# EAGLE board RP2040_MikroBUS-Panel (EAGLE 9.6.2), part 1 of 3
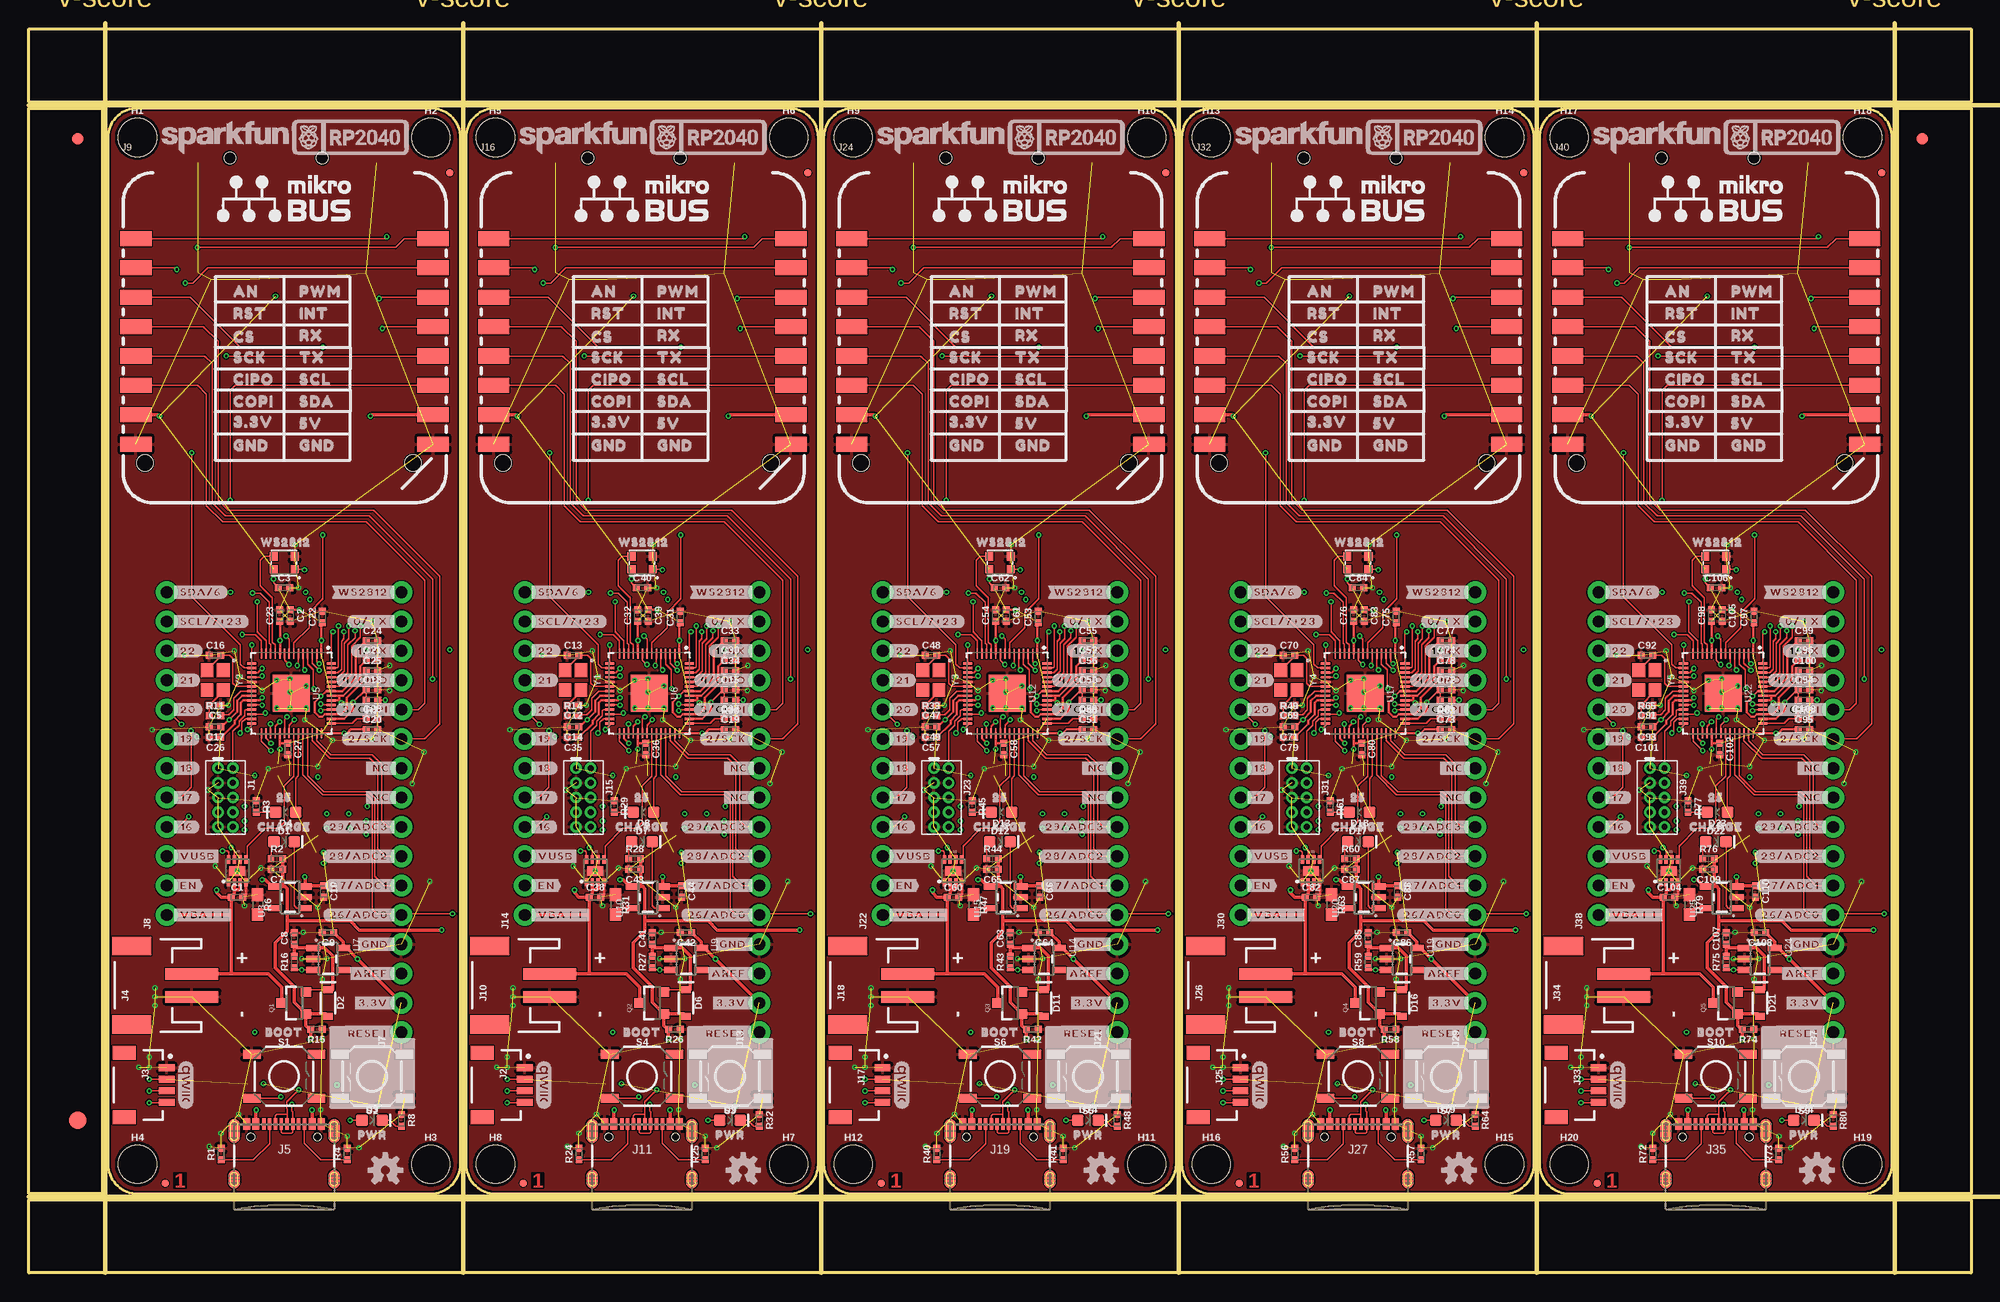
[diagram p0: board, top side]
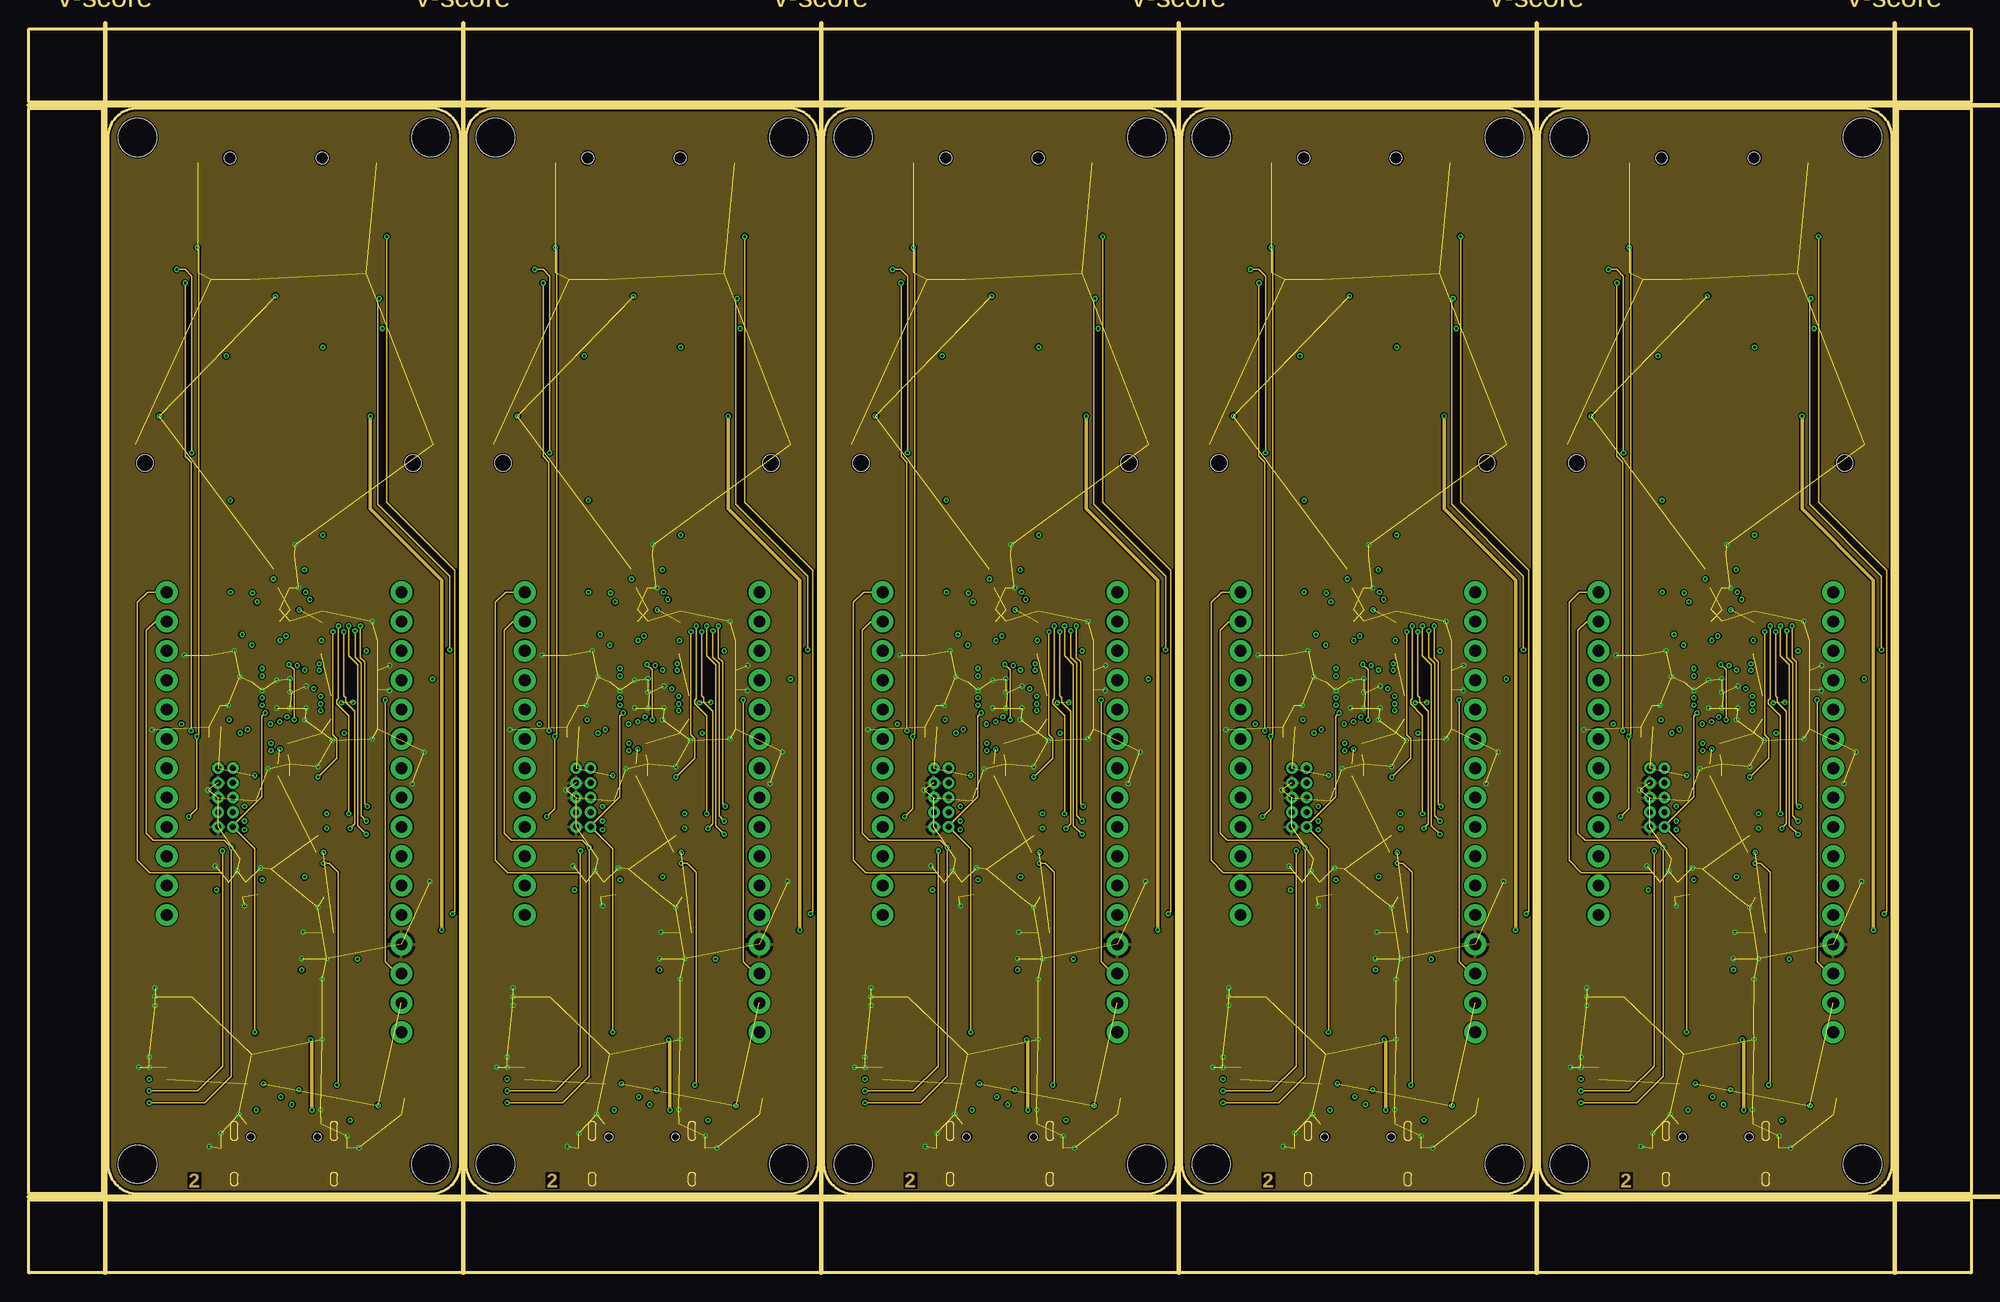
[diagram p1: board, inner layer Route2]
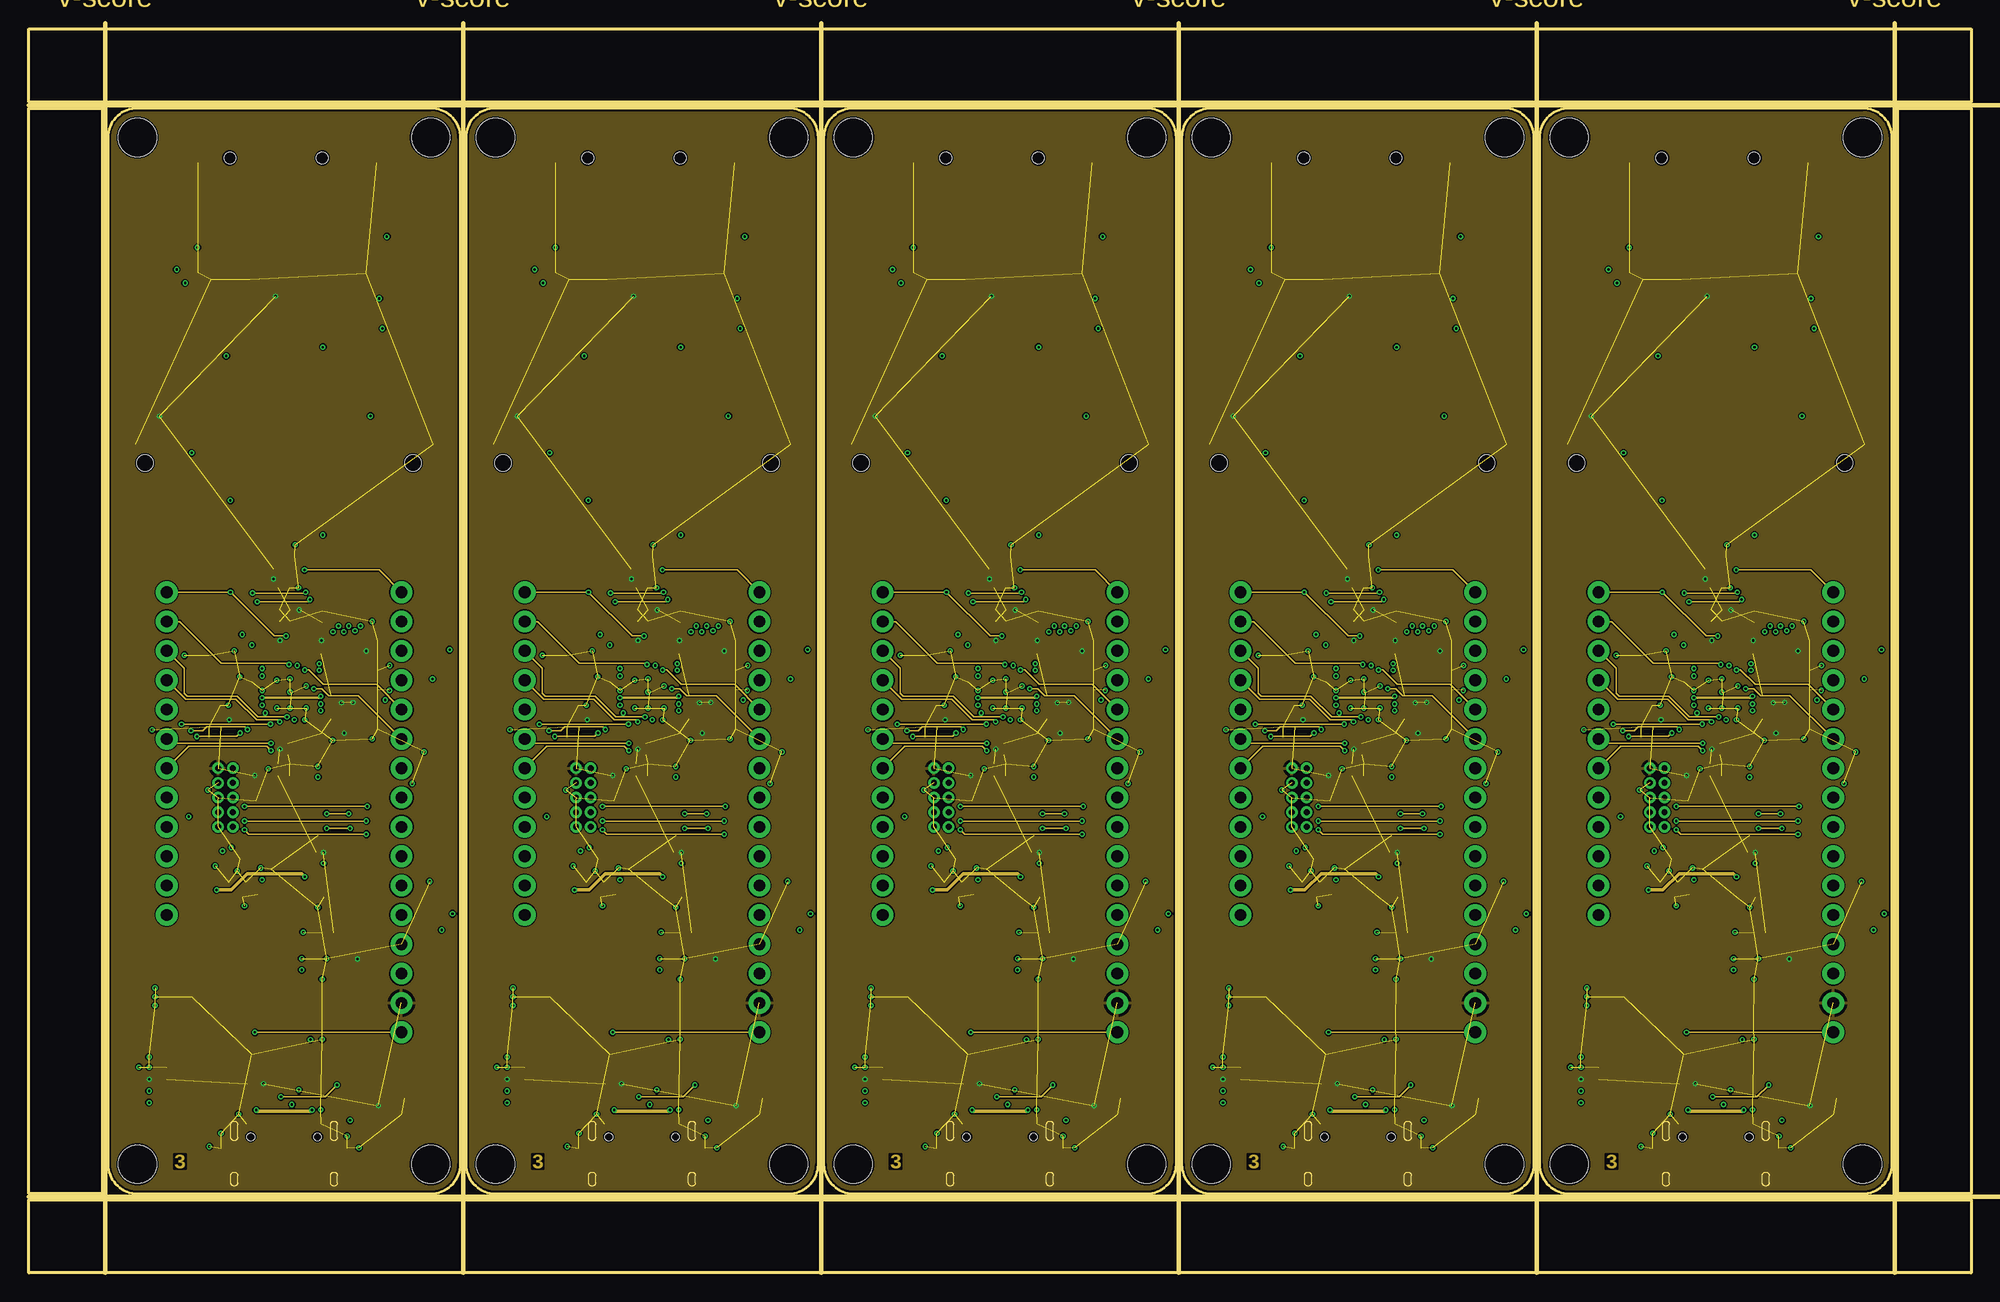
[diagram p2: board, inner layer Route15]
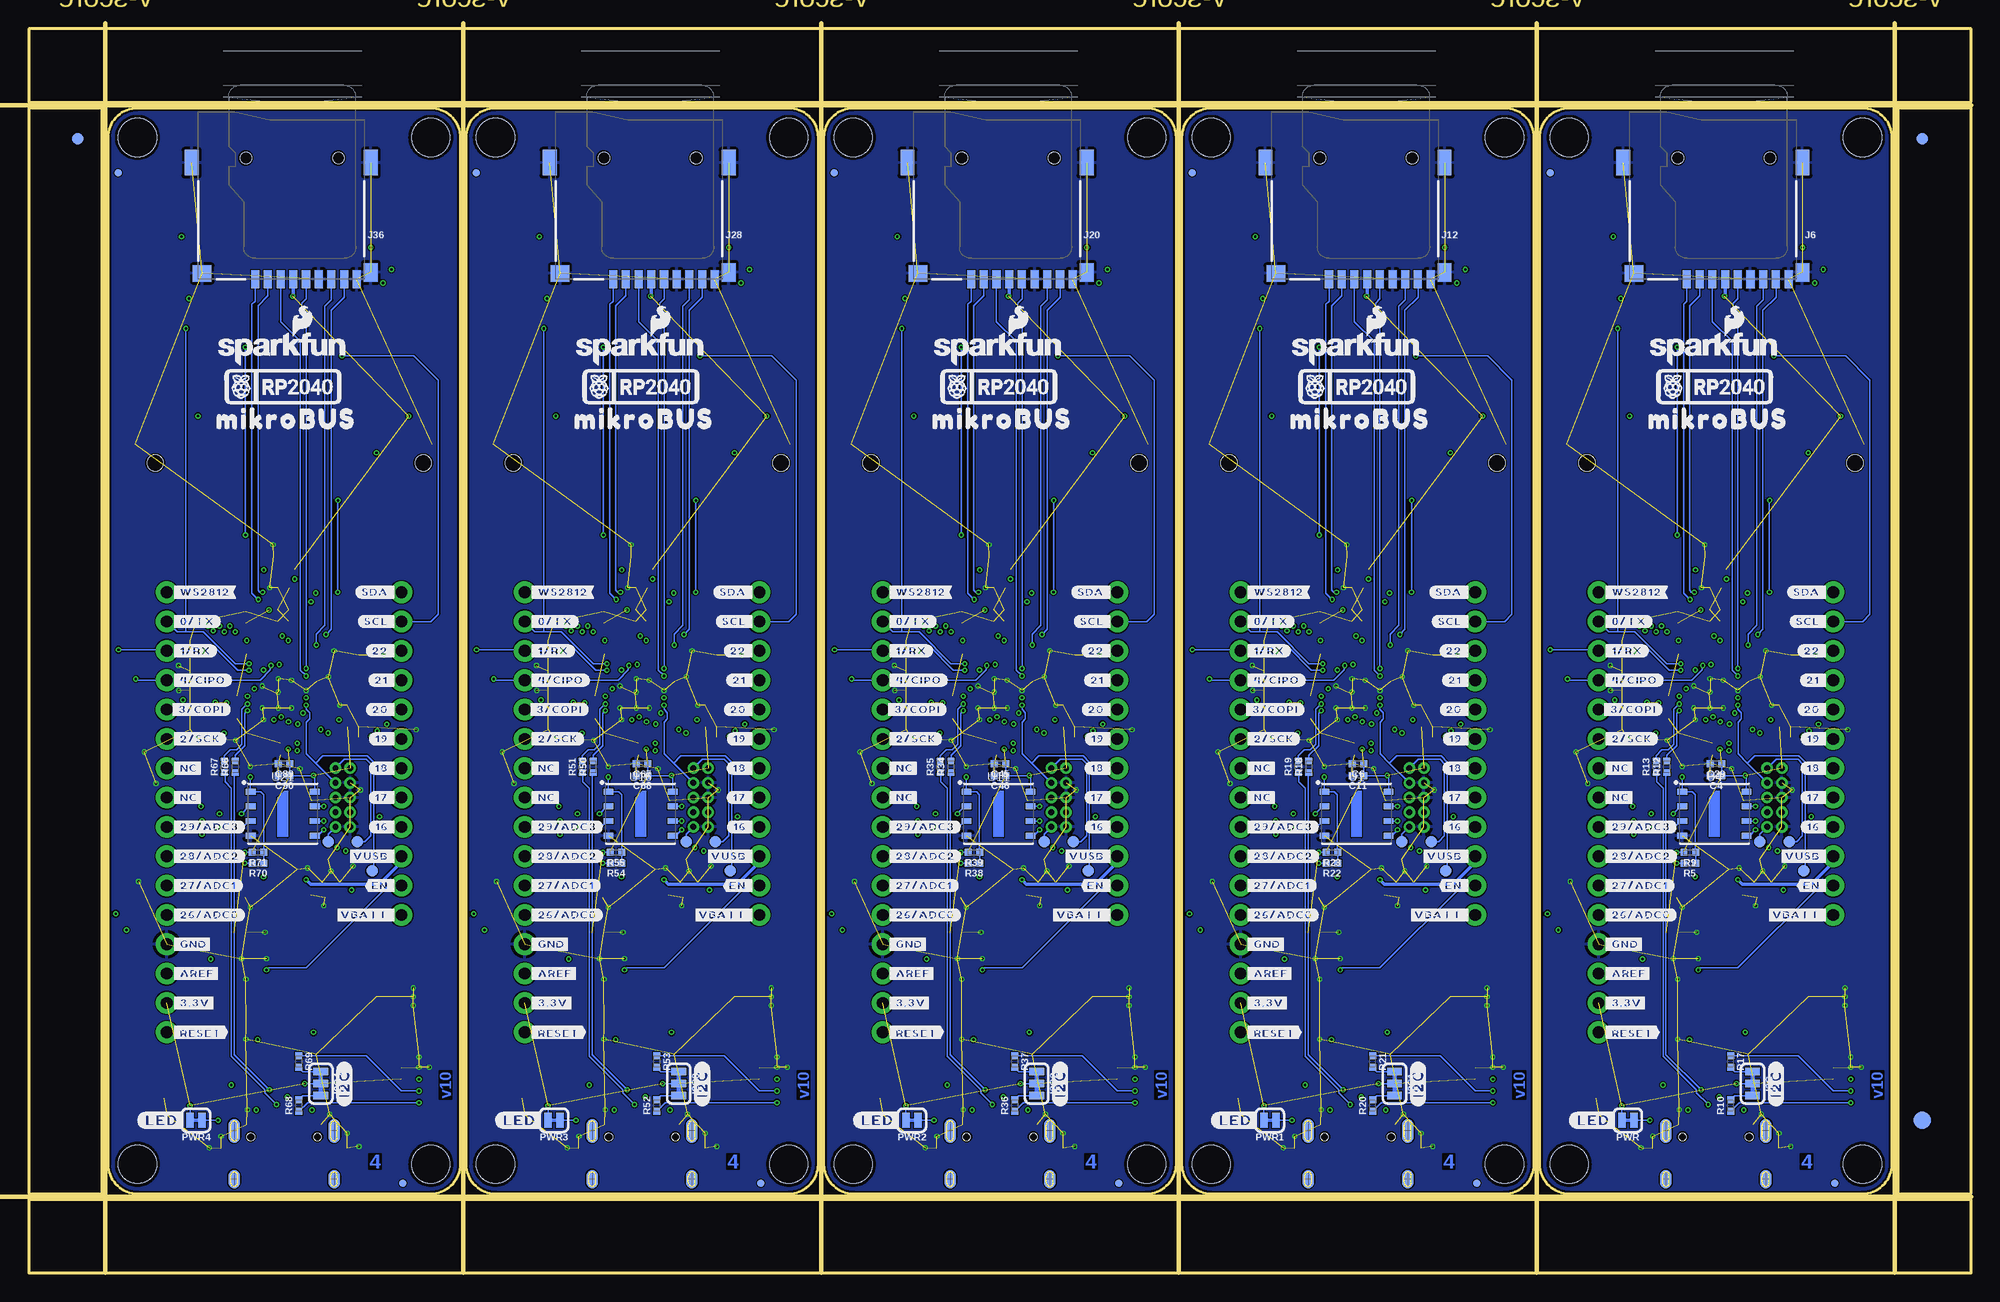
[diagram p3: board, bottom side, seen from below]

Size 168.15 x 107.7 mm. Coordinates in mm from the lower left corner, seen from the top.
Outline: 9.4,100.84 34.8,100.84 arc-90 37.34,98.3 37.34,9.4 arc-90 34.8,6.86 9.4,6.86 arc-90 6.86,9.4 6.86,98.3 arc-90 9.4,100.84
Outline: 40.39,100.84 65.79,100.84 arc-90 68.33,98.3 68.33,9.4 arc-90 65.79,6.86 40.39,6.86 arc-90 37.85,9.4 37.85,98.3 arc-90 40.39,100.84
Outline: 71.37,100.84 96.77,100.84 arc-90 99.31,98.3 99.31,9.4 arc-90 96.77,6.86 71.37,6.86 arc-90 68.83,9.4 68.83,98.3 arc-90 71.37,100.84
Outline: 102.36,100.84 127.76,100.84 arc-90 130.3,98.3 130.3,9.4 arc-90 127.76,6.86 102.36,6.86 arc-90 99.82,9.4 99.82,98.3 arc-90 102.36,100.84
Outline: 133.35,100.84 158.75,100.84 arc-90 161.29,98.3 161.29,9.4 arc-90 158.75,6.86 133.35,6.86 arc-90 130.81,9.4 130.81,98.3 arc-90 133.35,100.84
Outline: 0,6.35 168.15,6.35 168.15,0 0,0 0,6.35
Outline: 161.8,100.84 168.15,100.84 168.15,6.86 161.8,6.86 161.8,100.84
Outline: 0,107.7 168.15,107.7 168.15,101.35 0,101.35 0,107.7
Outline: 0,100.84 6.35,100.84 6.35,6.86 0,6.86 0,100.84
Copper layers (1+2*15+16): Top 0.035mm / dielectric 1.5mm / Route2 0.035mm / dielectric 0.15mm / Route15 0.035mm / dielectric 0.2mm / Bottom 0.035mm
Design rules "RP2040_MikroBUS": minimum track width 4mil, minimum drill 0.2mm, track to track 4mil, track to pad 4mil, pad to pad 4mil, via to via 4mil, smd to smd 4mil, copper to edge 6mil, drill to drill 6mil, minimum pad ring 3mil, minimum via ring 3mil, stop-mask expansion 2.5mil, vias tented up to drill 25mil, thermal gap 10mil
Net classes: 0 default: width 0 mm, drill 0 mm; 2 Clock: width 0.089 mm, clearance 0.178 mm
Milling: 8 lines

## Footprints (pad centres in the part's own frame; a part is rotated, then mirrored left to right if it is on the bottom)
0402-TIGHT = smd 0.6 x 0.6: 1 -0.5,0; 2 0.5,0
LED-0603 = smd 1 x 1: A -0.877,0; C 0.877,0
SOD-323 = smd 0.63 x 0.83: A 1.15,0; C -1.15,0
WS2812-2020 = smd 0.7 x 0.7: DI -0.915,0.55; DO 0.915,-0.55; GND 0.915,0.55; VCC -0.915,-0.55
FIDUCIAL-1X2 = smd 1 x 1: 1 0,0
FIDUCIAL-1.5X3 = smd 1.5 x 1.5: 1 0,0
FIDUCIAL-MICRO = smd 0.635 x 0.635: 1 0,0
STAND-OFF = hole 3.302: 0,0
SMT-JUMPER_3_2-NC_TRACE_SILK = smd 0.66 x 1.27: 1 -1.041,0; 2 0,0; 3 1.041,0
2X5-PTH-1.27MM = drill 0.508 pad 1: 1 -2.54,-0.635; 2 -2.54,0.635; 3 -1.27,-0.635; 4 -1.27,0.635; 5 0,-0.635; 6 0,0.635; 7 1.27,-0.635; 8 1.27,0.635; 9 2.54,-0.635; 10 2.54,0.635
JST04_1MM_RA = smd 0.6 x 1.35: 1 -1.5,0; 2 -0.5,0; 3 0.5,0; 4 1.5,0 | smd 1.2 x 2: NC1 2.8,-3.675; NC2 -2.8,-3.675
JST-2-SMD = smd 1 x 4.6: 1 -1,-3.7; 2 1,-3.7 | smd 1.6 x 3.4: NC1 -3.4,1.5; NC2 3.4,1.5
USB-C-16P-4LAYER-ISOLATED = smd 0.3 x 1: A5 -1.25,-0.34; A6 -0.25,-0.34; A7 0.25,-0.34; A8 1.25,-0.34; B5 1.75,-0.34; B6 0.75,-0.34; B7 -0.75,-0.34; B8 -1.75,-0.34 | smd 0.6 x 1: GND -3.225,-0.34; GND2 3.225,-0.34; VBUS1 -2.45,-0.34; VBUS2 2.45,-0.34 | smd 1 x 2.1: SHLD1 -4.32,-0.915; SHLD2 4.32,-0.915 | smd 1 x 2.1 bottom: SHLD3 -4.32,-0.915; SHLD4 4.32,-0.915 | smd 1 x 1.6: SHLD5 -4.32,-5.095; SHLD8 4.32,-5.095 | smd 1 x 1.6 bottom: SHLD6 -4.32,-5.095; SHLD7 4.32,-5.095 | hole 0.65: -2.89,-1.445; 2.89,-1.445
MICROSD-EXTERNALPIN = smd 0.7 x 1.6: 1 2.25,10.5; 2 1.15,10.5; 3 0.05,10.5; 4 -1.05,10.5; 5 -2.15,10.5; 6 -3.25,10.5; 7 -4.35,10.5; 8 -5.45,10.5; 9 -6.55,10.5 | smd 1.2 x 1.6: 10 -7.75,9.9 | smd 1.2 x 2.2: 11 -7.75,0.4; 12 7.75,0.4 | smd 1.6 x 1.4: 13 6.85,10 | hole 1: 3.05,0; -4.95,0
1X16_NO_SILK = drill 1.016 pad 1.88: 1 0,0; 2 2.54,0; 3 5.08,0; 4 7.62,0; 5 10.16,0; 6 12.7,0; 7 15.24,0; 8 17.78,0; 9 20.32,0; 10 22.86,0; 11 25.4,0; 12 27.94,0; 13 30.48,0; 14 33.02,0; 15 35.56,0; 16 38.1,0
1X12_NO_SILK = drill 1.016 pad 1.88: 1 0,0; 2 2.54,0; 3 5.08,0; 4 7.62,0; 5 10.16,0; 6 12.7,0; 7 15.24,0; 8 17.78,0; 9 20.32,0; 10 22.86,0; 11 25.4,0; 12 27.94,0
MIKROBUS_SMD_BLACK = smd 2.7 x 1.3: 1 -12.7,8.89; 2 -12.7,6.35; 3 -12.7,3.81; 4 -12.7,1.27; 5 -12.7,-1.27; 6 -12.7,-3.81; 7 -12.7,-6.35; 8 -12.7,-8.89; 9 13.02,-8.89; 10 13.02,-6.35; 11 13.02,-3.81; 12 13.02,-1.27; 13 13.02,1.27; 14 13.02,3.81; 15 13.02,6.35; 16 13.02,8.89 | hole 1.4: -11.914,-10.541; 11.286,-10.541
SMT-JUMPER_2_NC_TRACE_SILK = smd 0.66 x 1.27: 1 -0.521,0; 2 0.521,0
SOT23-3 = smd 0.8 x 0.9: 1 -0.95,-1; 2 0.95,-1; 3 0,1.1
0603 = smd 1.1 x 1: 1 -0.85,0; 2 0.85,0
TACTILE_SWITCH_SMD_5.2MM = smd 1.524 x 0.762: 1 -2.794,1.905; 2 2.794,1.905; 3 -2.794,-1.905; 4 2.794,-1.905
PAD.03X.04 = smd 1.016 x 1.016: 1 0,0
WSON-8-6X5-SKINNY_CENTERPAD = smd 0.85 x 0.5: 1 -2.775,1.905; 2 -2.775,0.635; 3 -2.775,-0.635; 4 -2.775,-1.905; 5 2.775,-1.905; 6 2.775,-0.635; 7 2.775,0.635; 8 2.775,1.905
DFN-8 = smd 0.3 x 0.7: 1 -0.75,-0.99; 2 -0.25,-0.99; 3 0.25,-0.99; 4 0.75,-0.99; 5 0.75,0.99; 6 0.25,0.99; 7 -0.25,0.99; 8 -0.75,0.99 | smd 1.38 x 0.8: 9 0,0
SOT23-5 = smd 0.55 x 1.2: 1 -0.95,-1.3; 2 0,-1.3; 3 0.95,-1.3; 4 0.95,1.3; 5 -0.95,1.3
QFN-56 = smd 0.875 x 0.2: 1 -3.437,2.6; 2 -3.437,2.2; 3 -3.437,1.8; 4 -3.437,1.4; 5 -3.437,1; 6 -3.437,0.6; 7 -3.437,0.2; 8 -3.437,-0.2; 9 -3.437,-0.6; 10 -3.437,-1; 11 -3.437,-1.4; 12 -3.437,-1.8; 13 -3.437,-2.2; 14 -3.437,-2.6; 29 3.437,-2.6; 30 3.437,-2.2; 31 3.437,-1.8; 32 3.437,-1.4; 33 3.437,-1; 34 3.437,-0.6; 35 3.437,-0.2; 36 3.437,0.2; 37 3.437,0.6; 38 3.437,1; 39 3.437,1.4; 40 3.437,1.8; 41 3.437,2.2; 42 3.437,2.6 | smd 0.2 x 0.875: 15 -2.6,-3.437; 16 -2.2,-3.437; 17 -1.8,-3.437; 18 -1.4,-3.437; 19 -1,-3.437; 20 -0.6,-3.437; 21 -0.2,-3.437; 22 0.2,-3.437; 23 0.6,-3.437; 24 1,-3.437; 25 1.4,-3.437; 26 1.8,-3.437; 27 2.2,-3.437; 28 2.6,-3.437; 43 2.6,3.437; 44 2.2,3.437; 45 1.8,3.437; 46 1.4,3.437; 47 1,3.437; 48 0.6,3.437; 49 0.2,3.437; 50 -0.2,3.437; 51 -0.6,3.437; 52 -1,3.437; 53 -1.4,3.437; 54 -1.8,3.437; 55 -2.2,3.437; 56 -2.6,3.437 | smd 3.2 x 3.2: EPAD 0,0
CRYSTAL-SMD-2X2.5MM = smd 1.2 x 1.1: P1 0.846,0.69; P2 -0.854,0.69; P3 -0.854,-0.71; P4 0.846,-0.71

## Placement (x,y rotation side)
C1  0.1uF  [0402-TIGHT]  18.03,32.51 0 top
C2  0.1uF  [0402-TIGHT]  22.64,56.9 270 top
C3  0.1uF  [0402-TIGHT]  22.1,59.31 0 top
C4  2.2uF  [0402-TIGHT]  22.1,43.05 180 bottom
C5  15pF  [0402-TIGHT]  16.13,49.15 180 top
C6  0.1uF  [0402-TIGHT]  53.09,44.07 180 bottom
C7  4.7uF  [0402-TIGHT]  21.46,34.92 180 top
C8  1.0uF  [0402-TIGHT]  22.99,28.96 90 top
C9  2.2uF  [0402-TIGHT]  25.91,29.46 180 top
C10  4.7uF  [0402-TIGHT]  25.53,33.02 270 top
C11  2.2uF  [0402-TIGHT]  53.09,43.05 180 bottom
C12  15pF  [0402-TIGHT]  47.12,49.15 180 top
C13  15pF  [0402-TIGHT]  47.12,53.47 0 top
C14  0.1uF  [0402-TIGHT]  47.12,47.28 180 top
C15  0.1uF  [0402-TIGHT]  60.71,50.48 0 top
C16  15pF  [0402-TIGHT]  16.13,53.47 0 top
C17  0.1uF  [0402-TIGHT]  16.13,47.28 180 top
C18  0.1uF  [0402-TIGHT]  29.72,50.48 0 top
C19  0.1uF  [0402-TIGHT]  60.71,47.04 0 top
C20  0.1uF  [0402-TIGHT]  29.72,47.04 0 top
C21  0.1uF  [0402-TIGHT]  29.72,53.05 0 top
C22  0.1uF  [0402-TIGHT]  25.4,56.77 90 top
C23  0.1uF  [0402-TIGHT]  21.72,56.9 90 top
C24  0.1uF  [0402-TIGHT]  29.72,54.74 0 top
C25  0.1uF  [0402-TIGHT]  29.72,52.13 0 top
C26  2.2uF  [0402-TIGHT]  16.13,46.35 180 top
C27  2.2uF  [0402-TIGHT]  22.43,45.34 270 top
C28  2.2uF  [0402-TIGHT]  29.72,47.96 0 top
C29  0.1uF  [0402-TIGHT]  22.1,44.07 180 bottom
C30  0.1uF  [0402-TIGHT]  60.71,53.05 0 top
C31  0.1uF  [0402-TIGHT]  56.39,56.77 90 top
C32  0.1uF  [0402-TIGHT]  52.7,56.9 90 top
C33  0.1uF  [0402-TIGHT]  60.71,54.74 0 top
C34  0.1uF  [0402-TIGHT]  60.71,52.13 0 top
C35  2.2uF  [0402-TIGHT]  47.12,46.35 180 top
C36  2.2uF  [0402-TIGHT]  53.42,45.34 270 top
C37  2.2uF  [0402-TIGHT]  60.71,47.96 0 top
C38  0.1uF  [0402-TIGHT]  49.02,32.51 0 top
C39  0.1uF  [0402-TIGHT]  53.63,56.9 270 top
C40  0.1uF  [0402-TIGHT]  53.09,59.31 0 top
C41  1.0uF  [0402-TIGHT]  53.97,28.96 90 top
C42  2.2uF  [0402-TIGHT]  56.9,29.46 180 top
C43  4.7uF  [0402-TIGHT]  52.45,34.92 180 top
C44  4.7uF  [0402-TIGHT]  56.51,33.02 270 top
C45  0.1uF  [0402-TIGHT]  84.07,44.07 180 bottom
C46  2.2uF  [0402-TIGHT]  84.07,43.05 180 bottom
C47  15pF  [0402-TIGHT]  78.11,49.15 180 top
C48  15pF  [0402-TIGHT]  78.11,53.47 0 top
C49  0.1uF  [0402-TIGHT]  78.11,47.28 180 top
C50  0.1uF  [0402-TIGHT]  91.69,50.48 0 top
C51  0.1uF  [0402-TIGHT]  91.69,47.04 0 top
C52  0.1uF  [0402-TIGHT]  91.69,53.05 0 top
C53  0.1uF  [0402-TIGHT]  87.38,56.77 90 top
C54  0.1uF  [0402-TIGHT]  83.69,56.9 90 top
C55  0.1uF  [0402-TIGHT]  91.69,54.74 0 top
C56  0.1uF  [0402-TIGHT]  91.69,52.13 0 top
C57  2.2uF  [0402-TIGHT]  78.11,46.35 180 top
C58  2.2uF  [0402-TIGHT]  84.4,45.34 270 top
C59  2.2uF  [0402-TIGHT]  91.69,47.96 0 top
C60  0.1uF  [0402-TIGHT]  80.01,32.51 0 top
C61  0.1uF  [0402-TIGHT]  84.62,56.9 270 top
C62  0.1uF  [0402-TIGHT]  84.07,59.31 0 top
C63  1.0uF  [0402-TIGHT]  84.96,28.96 90 top
C64  2.2uF  [0402-TIGHT]  87.88,29.46 180 top
C65  4.7uF  [0402-TIGHT]  83.44,34.92 180 top
C66  4.7uF  [0402-TIGHT]  87.5,33.02 270 top
C67  0.1uF  [0402-TIGHT]  115.06,44.07 180 bottom
C68  2.2uF  [0402-TIGHT]  115.06,43.05 180 bottom
C69  15pF  [0402-TIGHT]  109.09,49.15 180 top
C70  15pF  [0402-TIGHT]  109.09,53.47 0 top
C71  0.1uF  [0402-TIGHT]  109.09,47.28 180 top
C72  0.1uF  [0402-TIGHT]  122.68,50.48 0 top
C73  0.1uF  [0402-TIGHT]  122.68,47.04 0 top
C74  0.1uF  [0402-TIGHT]  122.68,53.05 0 top
C75  0.1uF  [0402-TIGHT]  118.36,56.77 90 top
C76  0.1uF  [0402-TIGHT]  114.68,56.9 90 top
C77  0.1uF  [0402-TIGHT]  122.68,54.74 0 top
C78  0.1uF  [0402-TIGHT]  122.68,52.13 0 top
C79  2.2uF  [0402-TIGHT]  109.09,46.35 180 top
C80  2.2uF  [0402-TIGHT]  115.39,45.34 270 top
C81  2.2uF  [0402-TIGHT]  122.68,47.96 0 top
C82  0.1uF  [0402-TIGHT]  111,32.51 0 top
C83  0.1uF  [0402-TIGHT]  115.61,56.9 270 top
C84  0.1uF  [0402-TIGHT]  115.06,59.31 0 top
C85  1.0uF  [0402-TIGHT]  115.95,28.96 90 top
C86  2.2uF  [0402-TIGHT]  118.87,29.46 180 top
C87  4.7uF  [0402-TIGHT]  114.43,34.92 180 top
C88  4.7uF  [0402-TIGHT]  118.49,33.02 270 top
C89  0.1uF  [0402-TIGHT]  146.05,44.07 180 bottom
C90  2.2uF  [0402-TIGHT]  146.05,43.05 180 bottom
C91  15pF  [0402-TIGHT]  140.08,49.15 180 top
C92  15pF  [0402-TIGHT]  140.08,53.47 0 top
C93  0.1uF  [0402-TIGHT]  140.08,47.28 180 top
C94  0.1uF  [0402-TIGHT]  153.67,50.48 0 top
C95  0.1uF  [0402-TIGHT]  153.67,47.04 0 top
C96  0.1uF  [0402-TIGHT]  153.67,53.05 0 top
C97  0.1uF  [0402-TIGHT]  149.35,56.77 90 top
C98  0.1uF  [0402-TIGHT]  145.67,56.9 90 top
C99  0.1uF  [0402-TIGHT]  153.67,54.74 0 top
C100  0.1uF  [0402-TIGHT]  153.67,52.13 0 top
C101  2.2uF  [0402-TIGHT]  140.08,46.35 180 top
C102  2.2uF  [0402-TIGHT]  146.38,45.34 270 top
C103  2.2uF  [0402-TIGHT]  153.67,47.96 0 top
C104  0.1uF  [0402-TIGHT]  141.99,32.51 0 top
C105  0.1uF  [0402-TIGHT]  146.6,56.9 270 top
C106  0.1uF  [0402-TIGHT]  146.05,59.31 0 top
C107  1.0uF  [0402-TIGHT]  146.94,28.96 90 top
C108  2.2uF  [0402-TIGHT]  149.86,29.46 180 top
C109  4.7uF  [0402-TIGHT]  145.41,34.92 180 top
C110  4.7uF  [0402-TIGHT]  149.48,33.02 270 top
D1  Yellow  [LED-0603]  22.1,37.34 0 top
D2  1A/23V/620mV  [SOD-323]  25.91,23.37 270 top
D3  RED  [LED-0603]  29.72,13.21 0 top
D4  BLUE  [LED-0603]  22.23,39.88 180 top
D5  WS2812_2020  [WS2812-2020]  22.1,61.47 0 top
D6  1A/23V/620mV  [SOD-323]  56.9,23.37 270 top
D7  Yellow  [LED-0603]  53.09,37.34 0 top
D8  BLUE  [LED-0603]  53.21,39.88 180 top
D9  RED  [LED-0603]  60.71,13.21 0 top
D10  WS2812_2020  [WS2812-2020]  53.09,61.47 0 top
D11  1A/23V/620mV  [SOD-323]  87.88,23.37 270 top
D12  Yellow  [LED-0603]  84.07,37.34 0 top
D13  BLUE  [LED-0603]  84.2,39.88 180 top
D14  RED  [LED-0603]  91.69,13.21 0 top
D15  WS2812_2020  [WS2812-2020]  84.07,61.47 0 top
D16  1A/23V/620mV  [SOD-323]  118.87,23.37 270 top
D17  Yellow  [LED-0603]  115.06,37.34 0 top
D18  BLUE  [LED-0603]  115.19,39.88 180 top
D19  RED  [LED-0603]  122.68,13.21 0 top
D20  WS2812_2020  [WS2812-2020]  115.06,61.47 0 top
D21  1A/23V/620mV  [SOD-323]  149.86,23.37 270 top
D22  Yellow  [LED-0603]  146.05,37.34 0 top
D23  BLUE  [LED-0603]  146.18,39.88 180 top
D24  RED  [LED-0603]  153.67,13.21 0 top
D25  WS2812_2020  [WS2812-2020]  146.05,61.47 0 top
E$1  [FIDUCIAL-1X2]  4.23,98.17 0 top
E$2  [FIDUCIAL-1X2]  4.23,98.17 0 bottom
E$3  [FIDUCIAL-1X2]  163.91,98.17 0 top
E$4  [FIDUCIAL-1X2]  163.91,98.17 0 bottom
E$5  [FIDUCIAL-1.5X3]  4.23,13.21 0 top
E$6  [FIDUCIAL-1.5X3]  4.23,13.21 0 bottom
FD1  FIDUCIALUFIDUCIAL  [FIDUCIAL-MICRO]  11.81,7.75 0 top
FD2  FIDUCIALUFIDUCIAL  [FIDUCIAL-MICRO]  36.45,95.25 0 top
FD3  FIDUCIALUFIDUCIAL  [FIDUCIAL-MICRO]  11.81,7.75 0 bottom
FD4  FIDUCIALUFIDUCIAL  [FIDUCIAL-MICRO]  36.45,95.25 0 bottom
FD5  FIDUCIALUFIDUCIAL  [FIDUCIAL-MICRO]  42.8,7.75 0 top
FD6  FIDUCIALUFIDUCIAL  [FIDUCIAL-MICRO]  67.44,95.25 0 top
FD7  FIDUCIALUFIDUCIAL  [FIDUCIAL-MICRO]  42.8,7.75 0 bottom
FD8  FIDUCIALUFIDUCIAL  [FIDUCIAL-MICRO]  67.44,95.25 0 bottom
FD9  FIDUCIALUFIDUCIAL  [FIDUCIAL-MICRO]  73.79,7.75 0 top
FD10  FIDUCIALUFIDUCIAL  [FIDUCIAL-MICRO]  98.42,95.25 0 top
FD11  FIDUCIALUFIDUCIAL  [FIDUCIAL-MICRO]  73.79,7.75 0 bottom
FD12  FIDUCIALUFIDUCIAL  [FIDUCIAL-MICRO]  98.42,95.25 0 bottom
FD13  FIDUCIALUFIDUCIAL  [FIDUCIAL-MICRO]  104.78,7.75 0 top
FD14  FIDUCIALUFIDUCIAL  [FIDUCIAL-MICRO]  129.41,95.25 0 top
FD15  FIDUCIALUFIDUCIAL  [FIDUCIAL-MICRO]  104.78,7.75 0 bottom
FD16  FIDUCIALUFIDUCIAL  [FIDUCIAL-MICRO]  129.41,95.25 0 bottom
FD17  FIDUCIALUFIDUCIAL  [FIDUCIAL-MICRO]  135.76,7.75 0 top
FD18  FIDUCIALUFIDUCIAL  [FIDUCIAL-MICRO]  160.4,95.25 0 top
FD19  FIDUCIALUFIDUCIAL  [FIDUCIAL-MICRO]  135.76,7.75 0 bottom
FD20  FIDUCIALUFIDUCIAL  [FIDUCIAL-MICRO]  160.4,95.25 0 bottom
H1  STAND-OFF  [STAND-OFF]  9.4,98.3 0 top
H2  STAND-OFF  [STAND-OFF]  34.8,98.3 0 top
H3  STAND-OFF  [STAND-OFF]  34.8,9.4 0 top
H4  STAND-OFF  [STAND-OFF]  9.4,9.4 0 top
H5  STAND-OFF  [STAND-OFF]  40.39,98.3 0 top
H6  STAND-OFF  [STAND-OFF]  65.79,98.3 0 top
H7  STAND-OFF  [STAND-OFF]  65.79,9.4 0 top
H8  STAND-OFF  [STAND-OFF]  40.39,9.4 0 top
H9  STAND-OFF  [STAND-OFF]  71.37,98.3 0 top
H10  STAND-OFF  [STAND-OFF]  96.77,98.3 0 top
H11  STAND-OFF  [STAND-OFF]  96.77,9.4 0 top
H12  STAND-OFF  [STAND-OFF]  71.37,9.4 0 top
H13  STAND-OFF  [STAND-OFF]  102.36,98.3 0 top
H14  STAND-OFF  [STAND-OFF]  127.76,98.3 0 top
H15  STAND-OFF  [STAND-OFF]  127.76,9.4 0 top
H16  STAND-OFF  [STAND-OFF]  102.36,9.4 0 top
H17  STAND-OFF  [STAND-OFF]  133.35,98.3 0 top
H18  STAND-OFF  [STAND-OFF]  158.75,98.3 0 top
H19  STAND-OFF  [STAND-OFF]  158.75,9.4 0 top
H20  STAND-OFF  [STAND-OFF]  133.35,9.4 0 top
I2C  JUMPER-SMT_3_2-NC_TRACE_SILK  [SMT-JUMPER_3_2-NC_TRACE_SILK]  18.92,16.38 270 bottom
I2C1  JUMPER-SMT_3_2-NC_TRACE_SILK  [SMT-JUMPER_3_2-NC_TRACE_SILK]  49.91,16.38 270 bottom
I2C2  JUMPER-SMT_3_2-NC_TRACE_SILK  [SMT-JUMPER_3_2-NC_TRACE_SILK]  80.9,16.38 270 bottom
I2C3  JUMPER-SMT_3_2-NC_TRACE_SILK  [SMT-JUMPER_3_2-NC_TRACE_SILK]  111.89,16.38 270 bottom
I2C4  JUMPER-SMT_3_2-NC_TRACE_SILK  [SMT-JUMPER_3_2-NC_TRACE_SILK]  142.88,16.38 270 bottom
J1  SWD  [2X5-PTH-1.27MM]  17.02,41.15 270 top
J2  Qwiic  [JST04_1MM_RA]  42.93,16.26 270 top
J3  Qwiic  [JST04_1MM_RA]  11.94,16.26 270 top
J4  [JST-2-SMD]  10.41,24.89 90 top
J5  USB C  [USB-C-16P-4LAYER-ISOLATED]  22.1,13.21 0 top
J6  microSD  [MICROSD-EXTERNALPIN]  22.35,96.52 180 bottom
J7  [1X16_NO_SILK]  32.26,20.83 90 top
J8  [1X12_NO_SILK]  11.94,30.99 90 top
J9  MIKROBUS_SMD_BLACK1  [MIKROBUS_SMD_BLACK]  21.97,80.65 0 top
J10  [JST-2-SMD]  41.4,24.89 90 top
J11  USB C  [USB-C-16P-4LAYER-ISOLATED]  53.09,13.21 0 top
J12  microSD  [MICROSD-EXTERNALPIN]  53.34,96.52 180 bottom
J13  [1X16_NO_SILK]  63.25,20.83 90 top
J14  [1X12_NO_SILK]  42.93,30.99 90 top
J15  SWD  [2X5-PTH-1.27MM]  48.01,41.15 270 top
J16  MIKROBUS_SMD_BLACK1  [MIKROBUS_SMD_BLACK]  52.96,80.65 0 top
J17  Qwiic  [JST04_1MM_RA]  73.91,16.26 270 top
J18  [JST-2-SMD]  72.39,24.89 90 top
J19  USB C  [USB-C-16P-4LAYER-ISOLATED]  84.07,13.21 0 top
J20  microSD  [MICROSD-EXTERNALPIN]  84.33,96.52 180 bottom
J21  [1X16_NO_SILK]  94.23,20.83 90 top
J22  [1X12_NO_SILK]  73.91,30.99 90 top
J23  SWD  [2X5-PTH-1.27MM]  78.99,41.15 270 top
J24  MIKROBUS_SMD_BLACK1  [MIKROBUS_SMD_BLACK]  83.95,80.65 0 top
J25  Qwiic  [JST04_1MM_RA]  104.9,16.26 270 top
J26  [JST-2-SMD]  103.38,24.89 90 top
J27  USB C  [USB-C-16P-4LAYER-ISOLATED]  115.06,13.21 0 top
J28  microSD  [MICROSD-EXTERNALPIN]  115.32,96.52 180 bottom
J29  [1X16_NO_SILK]  125.22,20.83 90 top
J30  [1X12_NO_SILK]  104.9,30.99 90 top
J31  SWD  [2X5-PTH-1.27MM]  109.98,41.15 270 top
J32  MIKROBUS_SMD_BLACK1  [MIKROBUS_SMD_BLACK]  114.94,80.65 0 top
J33  Qwiic  [JST04_1MM_RA]  135.89,16.26 270 top
J34  [JST-2-SMD]  134.37,24.89 90 top
J35  USB C  [USB-C-16P-4LAYER-ISOLATED]  146.05,13.21 0 top
J36  microSD  [MICROSD-EXTERNALPIN]  146.3,96.52 180 bottom
J37  [1X16_NO_SILK]  156.21,20.83 90 top
J38  [1X12_NO_SILK]  135.89,30.99 90 top
J39  SWD  [2X5-PTH-1.27MM]  140.97,41.15 270 top
J40  MIKROBUS_SMD_BLACK1  [MIKROBUS_SMD_BLACK]  145.92,80.65 0 top
LOGO1  OSHW-LOGOS  [OSHW-LOGO-S]  30.86,8.89 0 top
LOGO2  SFE_LOGO_NAME.1_INCH  [SFE_LOGO_NAME_.1]  17.02,98.3 0 top
LOGO3  OSHW-LOGOS  [OSHW-LOGO-S]  61.85,8.89 0 top
LOGO4  SFE_LOGO_NAME.1_INCH  [SFE_LOGO_NAME_.1]  48.01,98.3 0 top
LOGO5  OSHW-LOGOS  [OSHW-LOGO-S]  92.84,8.89 0 top
LOGO6  SFE_LOGO_NAME.1_INCH  [SFE_LOGO_NAME_.1]  78.99,98.3 0 top
LOGO7  OSHW-LOGOS  [OSHW-LOGO-S]  123.83,8.89 0 top
LOGO8  SFE_LOGO_NAME.1_INCH  [SFE_LOGO_NAME_.1]  109.98,98.3 0 top
LOGO9  OSHW-LOGOS  [OSHW-LOGO-S]  154.81,8.89 0 top
LOGO10  SFE_LOGO_NAME.1_INCH  [SFE_LOGO_NAME_.1]  140.97,98.3 0 top
PWR  JUMPER-SMT_2_NC_TRACE_SILK  [SMT-JUMPER_2_NC_TRACE_SILK]  29.72,13.21 180 bottom
PWR1  JUMPER-SMT_2_NC_TRACE_SILK  [SMT-JUMPER_2_NC_TRACE_SILK]  60.71,13.21 180 bottom
PWR2  JUMPER-SMT_2_NC_TRACE_SILK  [SMT-JUMPER_2_NC_TRACE_SILK]  91.69,13.21 180 bottom
PWR3  JUMPER-SMT_2_NC_TRACE_SILK  [SMT-JUMPER_2_NC_TRACE_SILK]  122.68,13.21 180 bottom
PWR4  JUMPER-SMT_2_NC_TRACE_SILK  [SMT-JUMPER_2_NC_TRACE_SILK]  153.67,13.21 180 bottom
Q1  20V/4.2A/52mΩ/1.4W  [SOT23-3]  22.99,23.37 90 top
Q2  20V/4.2A/52mΩ/1.4W  [SOT23-3]  53.97,23.37 90 top
Q3  20V/4.2A/52mΩ/1.4W  [SOT23-3]  84.96,23.37 90 top
Q4  20V/4.2A/52mΩ/1.4W  [SOT23-3]  115.95,23.37 90 top
Q5  20V/4.2A/52mΩ/1.4W  [SOT23-3]  146.94,23.37 90 top
R1  5.1k  [0402-TIGHT]  16.64,10.29 90 top
R2  1k  [0402-TIGHT]  21.46,35.84 0 top
R3  1k  [0402-TIGHT]  19.68,40.39 270 top
R4  5.1k  [0402-TIGHT]  27.56,10.29 90 top
R5  1k  [0402-TIGHT]  24.36,35.47 180 bottom
R6  2.0k  [0603]  19.81,31.88 270 top
R7  200OHM-0402T-1/16W-1%  [0402-TIGHT]  29.72,49.57 180 top
R8  1k  [0402-TIGHT]  32.26,13.21 270 top
R9  10k  [0402-TIGHT]  24.36,36.4 180 bottom
R10  2.2k  [0402-TIGHT]  20.83,14.48 90 bottom
R11  1k  [0402-TIGHT]  16.13,48.22 0 top
R12  27  [0402-TIGHT]  26.34,43.81 90 bottom
R13  27  [0402-TIGHT]  27.28,43.81 90 bottom
R14  1k  [0402-TIGHT]  47.12,48.22 0 top
R15  10k  [0402-TIGHT]  24.89,21.08 180 top
R16  10k  [0402-TIGHT]  22.99,26.92 90 top
R17  2.2k  [0402-TIGHT]  20.83,18.29 270 bottom
R18  27  [0402-TIGHT]  57.33,43.81 90 bottom
R19  27  [0402-TIGHT]  58.27,43.81 90 bottom
R20  2.2k  [0402-TIGHT]  51.82,14.48 90 bottom
R21  2.2k  [0402-TIGHT]  51.82,18.29 270 bottom
R22  1k  [0402-TIGHT]  55.35,35.47 180 bottom
R23  10k  [0402-TIGHT]  55.35,36.4 180 bottom
R24  5.1k  [0402-TIGHT]  47.62,10.29 90 top
R25  5.1k  [0402-TIGHT]  58.55,10.29 90 top
R26  10k  [0402-TIGHT]  55.88,21.08 180 top
R27  10k  [0402-TIGHT]  53.97,26.92 90 top
R28  1k  [0402-TIGHT]  52.45,35.84 0 top
R29  1k  [0402-TIGHT]  50.67,40.39 270 top
R30  200OHM-0402T-1/16W-1%  [0402-TIGHT]  60.71,49.57 180 top
R31  2.0k  [0603]  50.8,31.88 270 top
R32  1k  [0402-TIGHT]  63.25,13.21 270 top
R33  1k  [0402-TIGHT]  78.11,48.22 0 top
R34  27  [0402-TIGHT]  88.32,43.81 90 bottom
R35  27  [0402-TIGHT]  89.26,43.81 90 bottom
R36  2.2k  [0402-TIGHT]  82.8,14.48 90 bottom
R37  2.2k  [0402-TIGHT]  82.8,18.29 270 bottom
R38  1k  [0402-TIGHT]  86.33,35.47 180 bottom
R39  10k  [0402-TIGHT]  86.33,36.4 180 bottom
R40  5.1k  [0402-TIGHT]  78.61,10.29 90 top
R41  5.1k  [0402-TIGHT]  89.54,10.29 90 top
R42  10k  [0402-TIGHT]  86.87,21.08 180 top
R43  10k  [0402-TIGHT]  84.96,26.92 90 top
R44  1k  [0402-TIGHT]  83.44,35.84 0 top
R45  1k  [0402-TIGHT]  81.66,40.39 270 top
R46  200OHM-0402T-1/16W-1%  [0402-TIGHT]  91.69,49.57 180 top
R47  2.0k  [0603]  81.79,31.88 270 top
R48  1k  [0402-TIGHT]  94.23,13.21 270 top
R49  1k  [0402-TIGHT]  109.09,48.22 0 top
R50  27  [0402-TIGHT]  119.3,43.81 90 bottom
R51  27  [0402-TIGHT]  120.24,43.81 90 bottom
R52  2.2k  [0402-TIGHT]  113.79,14.48 90 bottom
R53  2.2k  [0402-TIGHT]  113.79,18.29 270 bottom
R54  1k  [0402-TIGHT]  117.32,35.47 180 bottom
R55  10k  [0402-TIGHT]  117.32,36.4 180 bottom
R56  5.1k  [0402-TIGHT]  109.6,10.29 90 top
R57  5.1k  [0402-TIGHT]  120.52,10.29 90 top
R58  10k  [0402-TIGHT]  117.86,21.08 180 top
R59  10k  [0402-TIGHT]  115.95,26.92 90 top
R60  1k  [0402-TIGHT]  114.43,35.84 0 top
R61  1k  [0402-TIGHT]  112.65,40.39 270 top
R62  200OHM-0402T-1/16W-1%  [0402-TIGHT]  122.68,49.57 180 top
R63  2.0k  [0603]  112.78,31.88 270 top
R64  1k  [0402-TIGHT]  125.22,13.21 270 top
R65  1k  [0402-TIGHT]  140.08,48.22 0 top
R66  27  [0402-TIGHT]  150.29,43.81 90 bottom
R67  27  [0402-TIGHT]  151.23,43.81 90 bottom
R68  2.2k  [0402-TIGHT]  144.78,14.48 90 bottom
R69  2.2k  [0402-TIGHT]  144.78,18.29 270 bottom
R70  1k  [0402-TIGHT]  148.31,35.47 180 bottom
R71  10k  [0402-TIGHT]  148.31,36.4 180 bottom
R72  5.1k  [0402-TIGHT]  140.59,10.29 90 top
R73  5.1k  [0402-TIGHT]  151.51,10.29 90 top
R74  10k  [0402-TIGHT]  148.84,21.08 180 top
R75  10k  [0402-TIGHT]  146.94,26.92 90 top
R76  1k  [0402-TIGHT]  145.41,35.84 0 top
R77  1k  [0402-TIGHT]  143.64,40.39 270 top
R78  200OHM-0402T-1/16W-1%  [0402-TIGHT]  153.67,49.57 180 top
R79  2.0k  [0603]  143.76,31.88 270 top
R80  1k  [0402-TIGHT]  156.21,13.21 270 top
S1  MOMENTARY-SWITCH-SPST-SMD-5.2MM-TALL  [TACTILE_SWITCH_SMD_5.2MM]  22.1,17.02 0 top
S2  MOMENTARY-SWITCH-SPST-SMD-5.2MM-TALL  [TACTILE_SWITCH_SMD_5.2MM]  29.72,17.02 180 top
S3  MOMENTARY-SWITCH-SPST-SMD-5.2MM-TALL  [TACTILE_SWITCH_SMD_5.2MM]  60.71,17.02 180 top
S4  MOMENTARY-SWITCH-SPST-SMD-5.2MM-TALL  [TACTILE_SWITCH_SMD_5.2MM]  53.09,17.02 0 top
S5  MOMENTARY-SWITCH-SPST-SMD-5.2MM-TALL  [TACTILE_SWITCH_SMD_5.2MM]  91.69,17.02 180 top
S6  MOMENTARY-SWITCH-SPST-SMD-5.2MM-TALL  [TACTILE_SWITCH_SMD_5.2MM]  84.07,17.02 0 top
S7  MOMENTARY-SWITCH-SPST-SMD-5.2MM-TALL  [TACTILE_SWITCH_SMD_5.2MM]  122.68,17.02 180 top
S8  MOMENTARY-SWITCH-SPST-SMD-5.2MM-TALL  [TACTILE_SWITCH_SMD_5.2MM]  115.06,17.02 0 top
S9  MOMENTARY-SWITCH-SPST-SMD-5.2MM-TALL  [TACTILE_SWITCH_SMD_5.2MM]  153.67,17.02 180 top
S10  MOMENTARY-SWITCH-SPST-SMD-5.2MM-TALL  [TACTILE_SWITCH_SMD_5.2MM]  146.05,17.02 0 top
TP1  TEST-POINT3X4  [PAD.03X.04]  14.48,34.8 0 bottom
TP2  TEST-POINT3X4  [PAD.03X.04]  15.75,37.34 0 bottom
TP3  TEST-POINT3X4  [PAD.03X.04]  18.29,37.34 0 bottom
TP4  TEST-POINT3X4  [PAD.03X.04]  45.47,34.8 0 bottom
TP5  TEST-POINT3X4  [PAD.03X.04]  46.74,37.34 0 bottom
TP6  TEST-POINT3X4  [PAD.03X.04]  49.28,37.34 0 bottom
TP7  TEST-POINT3X4  [PAD.03X.04]  76.45,34.8 0 bottom
TP8  TEST-POINT3X4  [PAD.03X.04]  77.72,37.34 0 bottom
TP9  TEST-POINT3X4  [PAD.03X.04]  80.26,37.34 0 bottom
TP10  TEST-POINT3X4  [PAD.03X.04]  107.44,34.8 0 bottom
TP11  TEST-POINT3X4  [PAD.03X.04]  108.71,37.34 0 bottom
TP12  TEST-POINT3X4  [PAD.03X.04]  111.25,37.34 0 bottom
TP13  TEST-POINT3X4  [PAD.03X.04]  138.43,34.8 0 bottom
TP14  TEST-POINT3X4  [PAD.03X.04]  139.7,37.34 0 bottom
TP15  TEST-POINT3X4  [PAD.03X.04]  142.24,37.34 0 bottom
U1  W25QXX128MBIT  [WSON-8-6X5-SKINNY_CENTERPAD]  53.21,39.75 0 bottom
U2  MAX17048  [DFN-8]  18.03,34.8 0 top
U3  MCP73831  [SOT23-5]  22.61,32.51 90 top
U4  W25QXX128MBIT  [WSON-8-6X5-SKINNY_CENTERPAD]  22.23,39.75 0 bottom
U5  RP2040  [QFN-56]  22.73,50.16 270 top
U6  RP2040  [QFN-56]  53.72,50.16 270 top
U7  3.3V  [SOT23-5]  25.91,27.18 270 top
U8  MAX17048  [DFN-8]  49.02,34.8 0 top
U9  3.3V  [SOT23-5]  56.9,27.18 270 top
U10  MCP73831  [SOT23-5]  53.59,32.51 90 top
U11  W25QXX128MBIT  [WSON-8-6X5-SKINNY_CENTERPAD]  84.2,39.75 0 bottom
U12  RP2040  [QFN-56]  84.71,50.16 270 top
U13  MAX17048  [DFN-8]  80.01,34.8 0 top
U14  3.3V  [SOT23-5]  87.88,27.18 270 top
U15  MCP73831  [SOT23-5]  84.58,32.51 90 top
U16  W25QXX128MBIT  [WSON-8-6X5-SKINNY_CENTERPAD]  115.19,39.75 0 bottom
U17  RP2040  [QFN-56]  115.7,50.16 270 top
U18  MAX17048  [DFN-8]  111,34.8 0 top
U19  3.3V  [SOT23-5]  118.87,27.18 270 top
U20  MCP73831  [SOT23-5]  115.57,32.51 90 top
U21  W25QXX128MBIT  [WSON-8-6X5-SKINNY_CENTERPAD]  146.18,39.75 0 bottom
U22  RP2040  [QFN-56]  146.69,50.16 270 top
U23  MAX17048  [DFN-8]  141.99,34.8 0 top
U24  3.3V  [SOT23-5]  149.86,27.18 270 top
U25  MCP73831  [SOT23-5]  146.56,32.51 90 top
U$1  [#_16#0]  12.32,38.61 0 top
U$2  [#_17#0]  12.32,41.15 0 top
U$3  [#_18#0]  12.32,43.69 0 top
U$4  [#_19#0]  12.32,46.23 0 top
U$5  [#_20#0]  12.32,48.77 0 top
U$6  [#_21#0]  12.32,51.31 0 top
U$7  [#_22#0]  12.32,53.85 0 top
U$8  [#_SCL#7#23#0]  12.32,56.39 0 top
U$9  [#_SDA#6#0]  12.32,58.93 0 top
U$10  [#WS2812_#0]  31.88,58.93 0 top
U$11  [#0#TX_#0]  31.88,56.39 0 top
U$12  [#1#RX_#0]  31.88,53.85 0 top
U$13  [#4#CIPO_#0]  31.88,51.31 0 top
U$14  [#3#COPI_#0]  31.88,48.77 0 top
U$15  [#2#SCK_#0]  31.88,46.23 0 top
U$16  [PWR0]  29.72,11.94 0 top
U$17  RASPI_RP2040_LOGO_10MM  [RASPI_RP2040_LOGO_10MM]  22.23,76.71 0 bottom
U$18  [#29#ADC3_#0]  31.88,38.61 0 top
U$19  [#28#ADC2_#0]  31.88,36.07 0 top
U$20  [#27#ADC1_#0]  31.88,33.53 0 top
U$21  [#26#ADC0_#0]  31.88,30.99 0 top
U$22  [#_VUSB#0]  12.32,36.07 0 top
U$23  [#_EN#0]  12.32,33.53 0 top
U$24  [#_VBATT#0]  12.32,30.99 0 top
U$25  [#GND_#0]  31.88,28.45 0 top
U$26  [#AREF_#0]  31.88,25.91 0 top
U$27  [#3#3V_#0]  31.88,23.37 0 top
U$28  [##RESET##0]  31.75,20.83 0 top
U$29  [AN0]  17.02,84.96 0 top
U$30  [WS28120]  19.56,63.25 0 top
U$31  [#_16#0]  43.31,38.61 0 top
U$32  [SFE_LOGO_NAME_FLAME_.1]  22.23,80.01 0 bottom
U$33  [#SCL_#0]  12.32,56.39 0 bottom
U$34  [#SDA_#0]  12.32,58.93 0 bottom
U$35  [#_#RESET##0]  31.88,20.83 0 bottom
U$36  [#_3#3V#0]  31.88,23.37 0 bottom
U$37  [#_AREF#0]  31.88,25.91 0 bottom
U$38  [#_GND#0]  31.88,28.45 0 bottom
U$39  [#_26#ADC0#0]  31.88,30.99 0 bottom
U$40  [#_27#ADC1#0]  31.88,33.53 0 bottom
U$41  [#_28#ADC2#0]  31.88,36.07 0 bottom
U$42  [#_29#ADC3#0]  31.88,38.61 0 bottom
U$43  [#LED#0]  34.8,13.21 0 bottom
U$44  [RST0]  17.02,83.06 0 top
U$45  [CS0]  17.02,81.03 0 top
U$46  [#_17#0]  43.31,41.15 0 top
U$47  [#_NC_#0]  28.96,43.69 0 top
U$48  [#_NC_#0]  28.96,41.15 0 top
U$49  [#_2#SCK#0]  31.88,46.23 0 bottom
U$50  [#_3#COPI#0]  32,48.77 0 bottom
U$51  [#_4#CIPO#0]  31.88,51.31 0 bottom
U$52  [#_1#RX#0]  31.88,53.85 0 bottom
U$53  [#_0#TX#0]  31.88,56.39 0 bottom
U$54  [250]  22.1,41.15 0 top
U$55  [CHARGE0]  22.1,38.61 0 top
U$56  [BOOT0]  22.1,20.83 0 top
U$57  [#22_#0]  12.32,53.85 0 bottom
U$58  [#21_#0]  12.32,51.31 0 bottom
U$59  [#20_#0]  12.32,48.77 0 bottom
U$60  [CIPO0]  17.02,77.34 0 top
U$61  [#19_#0]  12.32,46.23 0 bottom
U$62  [#18_#0]  12.32,43.69 0 bottom
U$63  [#17_#0]  12.32,41.15 0 bottom
U$64  [QWIIC_4MM]  13.59,16.26 270 top
U$65  [#16_#0]  12.32,38.61 0 bottom
U$66  [#VUSB_#0]  12.32,36.07 0 bottom
U$67  [#EN_#0]  12.32,33.53 0 bottom
U$68  [#VBATT_#0]  12.32,30.99 0 bottom
U$69  [#_NC#0]  31.88,41.15 0 bottom
U$70  [#_NC#0]  31.88,43.69 0 bottom
U$71  [#_WS2812#0]  31.88,58.93 0 bottom
U$72  [#I2C#0]  16.89,14.48 90 bottom
U$73  RASPI_RP2040_LOGO_10MM  [RASPI_RP2040_LOGO_10MM]  27.81,98.3 0 top
U$74  [SCK0]  17.02,79.25 0 top
U$75  [COPI0]  17.02,75.44 0 top
U$76  [3#3V0]  17.02,73.66 0 top
U$77  [GND0]  17.02,71.63 0 top
U$78  [GND0]  22.73,71.63 0 top
U$79  [5V0]  22.73,73.53 0 top
U$80  [SDA0]  22.73,75.44 0 top
U$81  [SCL0]  22.73,77.34 0 top
U$82  [TX0]  22.73,79.25 0 top
U$83  [RX0]  22.73,81.15 0 top
U$84  [INT0]  22.73,83.06 0 top
U$85  [PWM0]  22.73,84.96 0 top
U$86  [#_18#0]  43.31,43.69 0 top
U$87  [#_19#0]  43.31,46.23 0 top
U$88  [MIKROBUS0]  29.21,73.91 0 bottom
U$89  [#_20#0]  43.31,48.77 0 top
U$90  [#_21#0]  43.31,51.31 0 top
U$91  [#_22#0]  43.31,53.85 0 top
U$92  [#WS2812_#0]  62.86,58.93 0 top
U$93  [#0#TX_#0]  62.86,56.39 0 top
U$94  [#1#RX_#0]  62.86,53.85 0 top
U$95  [#4#CIPO_#0]  62.86,51.31 0 top
U$96  [#3#COPI_#0]  62.86,48.77 0 top
U$97  [#2#SCK_#0]  62.86,46.23 0 top
U$98  [#_SCL#7#23#0]  43.31,56.39 0 top
U$99  [#_SDA#6#0]  43.31,58.93 0 top
U$100  [#29#ADC3_#0]  62.86,38.61 0 top
U$101  [#28#ADC2_#0]  62.86,36.07 0 top
U$102  [#27#ADC1_#0]  62.86,33.53 0 top
U$103  [#26#ADC0_#0]  62.86,30.99 0 top
U$104  [#_VUSB#0]  43.31,36.07 0 top
U$105  [#_EN#0]  43.31,33.53 0 top
U$106  [#_VBATT#0]  43.31,30.99 0 top
U$107  [#GND_#0]  62.86,28.45 0 top
U$108  [#AREF_#0]  62.86,25.91 0 top
U$109  [#3#3V_#0]  62.86,23.37 0 top
U$110  [##RESET##0]  62.74,20.83 0 top
U$111  [QWIIC_4MM]  44.58,16.26 270 top
U$112  [SFE_LOGO_NAME_FLAME_.1]  53.21,80.01 0 bottom
U$113  [250]  53.09,41.15 0 top
U$114  [CHARGE0]  53.09,38.61 0 top
U$115  [BOOT0]  53.09,20.83 0 top
U$116  [#22_#0]  43.31,53.85 0 bottom
U$117  [#21_#0]  43.31,51.31 0 bottom
U$118  [#20_#0]  43.31,48.77 0 bottom
U$119  [#19_#0]  43.31,46.23 0 bottom
U$120  [#18_#0]  43.31,43.69 0 bottom
U$121  [#17_#0]  43.31,41.15 0 bottom
U$122  [#16_#0]  43.31,38.61 0 bottom
U$123  [#VUSB_#0]  43.31,36.07 0 bottom
U$124  [#EN_#0]  43.31,33.53 0 bottom
U$125  [#VBATT_#0]  43.31,30.99 0 bottom
U$126  [#SCL_#0]  43.31,56.39 0 bottom
U$127  [#SDA_#0]  43.31,58.93 0 bottom
U$128  [#_#RESET##0]  62.86,20.83 0 bottom
U$129  [#_3#3V#0]  62.86,23.37 0 bottom
U$130  [#_AREF#0]  62.86,25.91 0 bottom
U$131  [#_GND#0]  62.86,28.45 0 bottom
U$132  [#_26#ADC0#0]  62.86,30.99 0 bottom
U$133  [#_27#ADC1#0]  62.86,33.53 0 bottom
U$134  [#_28#ADC2#0]  62.86,36.07 0 bottom
U$135  [#_29#ADC3#0]  62.86,38.61 0 bottom
U$136  [#_NC#0]  62.86,41.15 0 bottom
U$137  [#_NC#0]  62.86,43.69 0 bottom
U$138  [PWR0]  60.71,11.94 0 top
U$139  [#_NC_#0]  59.94,43.69 0 top
U$140  [#_NC_#0]  59.94,41.15 0 top
U$141  [#_2#SCK#0]  62.86,46.23 0 bottom
U$142  [#_3#COPI#0]  62.99,48.77 0 bottom
U$143  [#_4#CIPO#0]  62.86,51.31 0 bottom
U$144  [#_1#RX#0]  62.86,53.85 0 bottom
U$145  [#_0#TX#0]  62.86,56.39 0 bottom
U$146  [#_WS2812#0]  62.86,58.93 0 bottom
U$147  [#I2C#0]  47.88,14.48 90 bottom
U$148  RASPI_RP2040_LOGO_10MM  [RASPI_RP2040_LOGO_10MM]  53.21,76.71 0 bottom
U$149  RASPI_RP2040_LOGO_10MM  [RASPI_RP2040_LOGO_10MM]  58.8,98.3 0 top
U$150  [WS28120]  50.55,63.25 0 top
U$151  [AN0]  48.01,84.96 0 top
U$152  [RST0]  48.01,83.06 0 top
U$153  [CS0]  48.01,81.03 0 top
U$154  [CIPO0]  48.01,77.34 0 top
U$155  [SCK0]  48.01,79.25 0 top
U$156  [COPI0]  48.01,75.44 0 top
U$157  [3#3V0]  48.01,73.66 0 top
U$158  [GND0]  48.01,71.63 0 top
U$159  [GND0]  53.72,71.63 0 top
U$160  [5V0]  53.72,73.53 0 top
U$161  [SDA0]  53.72,75.44 0 top
U$162  [SCL0]  53.72,77.34 0 top
U$163  [TX0]  53.72,79.25 0 top
U$164  [RX0]  53.72,81.15 0 top
U$165  [INT0]  53.72,83.06 0 top
U$166  [PWM0]  53.72,84.96 0 top
U$167  [MIKROBUS0]  60.2,73.91 0 bottom
U$168  [#LED#0]  65.79,13.21 0 bottom
U$169  [#_16#0]  74.3,38.61 0 top
U$170  [#_17#0]  74.3,41.15 0 top
U$171  [#_18#0]  74.3,43.69 0 top
U$172  [#_19#0]  74.3,46.23 0 top
U$173  [#_20#0]  74.3,48.77 0 top
U$174  [#_21#0]  74.3,51.31 0 top
U$175  [#_22#0]  74.3,53.85 0 top
U$176  [#WS2812_#0]  93.85,58.93 0 top
U$177  [#0#TX_#0]  93.85,56.39 0 top
U$178  [#1#RX_#0]  93.85,53.85 0 top
U$179  [#4#CIPO_#0]  93.85,51.31 0 top
U$180  [#3#COPI_#0]  93.85,48.77 0 top
U$181  [#2#SCK_#0]  93.85,46.23 0 top
U$182  [#_SCL#7#23#0]  74.3,56.39 0 top
U$183  [#_SDA#6#0]  74.3,58.93 0 top
U$184  [#29#ADC3_#0]  93.85,38.61 0 top
U$185  [#28#ADC2_#0]  93.85,36.07 0 top
U$186  [#27#ADC1_#0]  93.85,33.53 0 top
U$187  [#26#ADC0_#0]  93.85,30.99 0 top
U$188  [#_VUSB#0]  74.3,36.07 0 top
U$189  [#_EN#0]  74.3,33.53 0 top
U$190  [#_VBATT#0]  74.3,30.99 0 top
U$191  [#GND_#0]  93.85,28.45 0 top
U$192  [#AREF_#0]  93.85,25.91 0 top
U$193  [#3#3V_#0]  93.85,23.37 0 top
U$194  [##RESET##0]  93.73,20.83 0 top
U$195  [QWIIC_4MM]  75.56,16.26 270 top
U$196  [SFE_LOGO_NAME_FLAME_.1]  84.2,80.01 0 bottom
U$197  [250]  84.07,41.15 0 top
U$198  [CHARGE0]  84.07,38.61 0 top
U$199  [BOOT0]  84.07,20.83 0 top
U$200  [#22_#0]  74.3,53.85 0 bottom
U$201  [#21_#0]  74.3,51.31 0 bottom
U$202  [#20_#0]  74.3,48.77 0 bottom
U$203  [#19_#0]  74.3,46.23 0 bottom
U$204  [#18_#0]  74.3,43.69 0 bottom
U$205  [#17_#0]  74.3,41.15 0 bottom
U$206  [#16_#0]  74.3,38.61 0 bottom
U$207  [#VUSB_#0]  74.3,36.07 0 bottom
U$208  [#EN_#0]  74.3,33.53 0 bottom
U$209  [#VBATT_#0]  74.3,30.99 0 bottom
U$210  [#SCL_#0]  74.3,56.39 0 bottom
U$211  [#SDA_#0]  74.3,58.93 0 bottom
U$212  [#_#RESET##0]  93.85,20.83 0 bottom
U$213  [#_3#3V#0]  93.85,23.37 0 bottom
U$214  [#_AREF#0]  93.85,25.91 0 bottom
U$215  [#_GND#0]  93.85,28.45 0 bottom
U$216  [#_26#ADC0#0]  93.85,30.99 0 bottom
U$217  [#_27#ADC1#0]  93.85,33.53 0 bottom
U$218  [#_28#ADC2#0]  93.85,36.07 0 bottom
U$219  [#_29#ADC3#0]  93.85,38.61 0 bottom
U$220  [#_NC#0]  93.85,41.15 0 bottom
U$221  [#_NC#0]  93.85,43.69 0 bottom
U$222  [PWR0]  91.69,11.94 0 top
U$223  [#_NC_#0]  90.93,43.69 0 top
U$224  [#_NC_#0]  90.93,41.15 0 top
U$225  [#_2#SCK#0]  93.85,46.23 0 bottom
U$226  [#_3#COPI#0]  93.98,48.77 0 bottom
U$227  [#_4#CIPO#0]  93.85,51.31 0 bottom
U$228  [#_1#RX#0]  93.85,53.85 0 bottom
U$229  [#_0#TX#0]  93.85,56.39 0 bottom
U$230  [#_WS2812#0]  93.85,58.93 0 bottom
U$231  [#I2C#0]  78.87,14.48 90 bottom
U$232  RASPI_RP2040_LOGO_10MM  [RASPI_RP2040_LOGO_10MM]  84.2,76.71 0 bottom
U$233  RASPI_RP2040_LOGO_10MM  [RASPI_RP2040_LOGO_10MM]  89.79,98.3 0 top
U$234  [WS28120]  81.53,63.25 0 top
U$235  [AN0]  78.99,84.96 0 top
U$236  [RST0]  78.99,83.06 0 top
U$237  [CS0]  78.99,81.03 0 top
U$238  [CIPO0]  78.99,77.34 0 top
U$239  [SCK0]  78.99,79.25 0 top
U$240  [COPI0]  78.99,75.44 0 top
U$241  [3#3V0]  78.99,73.66 0 top
U$242  [GND0]  78.99,71.63 0 top
U$243  [GND0]  84.71,71.63 0 top
U$244  [5V0]  84.71,73.53 0 top
U$245  [SDA0]  84.71,75.44 0 top
U$246  [SCL0]  84.71,77.34 0 top
U$247  [TX0]  84.71,79.25 0 top
U$248  [RX0]  84.71,81.15 0 top
U$249  [INT0]  84.71,83.06 0 top
U$250  [PWM0]  84.71,84.96 0 top
U$251  [MIKROBUS0]  91.19,73.91 0 bottom
U$252  [#LED#0]  96.77,13.21 0 bottom
U$253  [#_16#0]  105.28,38.61 0 top
U$254  [#_17#0]  105.28,41.15 0 top
U$255  [#_18#0]  105.28,43.69 0 top
U$256  [#_19#0]  105.28,46.23 0 top
U$257  [#_20#0]  105.28,48.77 0 top
U$258  [#_21#0]  105.28,51.31 0 top
U$259  [#_22#0]  105.28,53.85 0 top
U$260  [#WS2812_#0]  124.84,58.93 0 top
U$261  [#0#TX_#0]  124.84,56.39 0 top
U$262  [#1#RX_#0]  124.84,53.85 0 top
U$263  [#4#CIPO_#0]  124.84,51.31 0 top
U$264  [#3#COPI_#0]  124.84,48.77 0 top
U$265  [#2#SCK_#0]  124.84,46.23 0 top
U$266  [#_SCL#7#23#0]  105.28,56.39 0 top
U$267  [#_SDA#6#0]  105.28,58.93 0 top
U$268  [#29#ADC3_#0]  124.84,38.61 0 top
U$269  [#28#ADC2_#0]  124.84,36.07 0 top
U$270  [#27#ADC1_#0]  124.84,33.53 0 top
U$271  [#26#ADC0_#0]  124.84,30.99 0 top
U$272  [#_VUSB#0]  105.28,36.07 0 top
U$273  [#_EN#0]  105.28,33.53 0 top
U$274  [#_VBATT#0]  105.28,30.99 0 top
U$275  [#GND_#0]  124.84,28.45 0 top
U$276  [#AREF_#0]  124.84,25.91 0 top
U$277  [#3#3V_#0]  124.84,23.37 0 top
U$278  [##RESET##0]  124.71,20.83 0 top
U$279  [QWIIC_4MM]  106.55,16.26 270 top
U$280  [SFE_LOGO_NAME_FLAME_.1]  115.19,80.01 0 bottom
U$281  [250]  115.06,41.15 0 top
U$282  [CHARGE0]  115.06,38.61 0 top
U$283  [BOOT0]  115.06,20.83 0 top
U$284  [#22_#0]  105.28,53.85 0 bottom
U$285  [#21_#0]  105.28,51.31 0 bottom
U$286  [#20_#0]  105.28,48.77 0 bottom
U$287  [#19_#0]  105.28,46.23 0 bottom
U$288  [#18_#0]  105.28,43.69 0 bottom
U$289  [#17_#0]  105.28,41.15 0 bottom
U$290  [#16_#0]  105.28,38.61 0 bottom
U$291  [#VUSB_#0]  105.28,36.07 0 bottom
U$292  [#EN_#0]  105.28,33.53 0 bottom
U$293  [#VBATT_#0]  105.28,30.99 0 bottom
U$294  [#SCL_#0]  105.28,56.39 0 bottom
U$295  [#SDA_#0]  105.28,58.93 0 bottom
U$296  [#_#RESET##0]  124.84,20.83 0 bottom
U$297  [#_3#3V#0]  124.84,23.37 0 bottom
U$298  [#_AREF#0]  124.84,25.91 0 bottom
U$299  [#_GND#0]  124.84,28.45 0 bottom
U$300  [#_26#ADC0#0]  124.84,30.99 0 bottom
U$301  [#_27#ADC1#0]  124.84,33.53 0 bottom
U$302  [#_28#ADC2#0]  124.84,36.07 0 bottom
U$303  [#_29#ADC3#0]  124.84,38.61 0 bottom
U$304  [#_NC#0]  124.84,41.15 0 bottom
U$305  [#_NC#0]  124.84,43.69 0 bottom
U$306  [PWR0]  122.68,11.94 0 top
U$307  [#_NC_#0]  121.92,43.69 0 top
U$308  [#_NC_#0]  121.92,41.15 0 top
U$309  [#_2#SCK#0]  124.84,46.23 0 bottom
U$310  [#_3#COPI#0]  124.97,48.77 0 bottom
U$311  [#_4#CIPO#0]  124.84,51.31 0 bottom
U$312  [#_1#RX#0]  124.84,53.85 0 bottom
U$313  [#_0#TX#0]  124.84,56.39 0 bottom
U$314  [#_WS2812#0]  124.84,58.93 0 bottom
U$315  [#I2C#0]  109.86,14.48 90 bottom
U$316  RASPI_RP2040_LOGO_10MM  [RASPI_RP2040_LOGO_10MM]  115.19,76.71 0 bottom
U$317  RASPI_RP2040_LOGO_10MM  [RASPI_RP2040_LOGO_10MM]  120.78,98.3 0 top
U$318  [WS28120]  112.52,63.25 0 top
U$319  [AN0]  109.98,84.96 0 top
U$320  [RST0]  109.98,83.06 0 top
U$321  [CS0]  109.98,81.03 0 top
U$322  [CIPO0]  109.98,77.34 0 top
U$323  [SCK0]  109.98,79.25 0 top
U$324  [COPI0]  109.98,75.44 0 top
U$325  [3#3V0]  109.98,73.66 0 top
U$326  [GND0]  109.98,71.63 0 top
U$327  [GND0]  115.7,71.63 0 top
U$328  [5V0]  115.7,73.53 0 top
U$329  [SDA0]  115.7,75.44 0 top
U$330  [SCL0]  115.7,77.34 0 top
U$331  [TX0]  115.7,79.25 0 top
U$332  [RX0]  115.7,81.15 0 top
U$333  [INT0]  115.7,83.06 0 top
U$334  [PWM0]  115.7,84.96 0 top
U$335  [MIKROBUS0]  122.17,73.91 0 bottom
U$336  [#LED#0]  127.76,13.21 0 bottom
U$337  [#_16#0]  136.27,38.61 0 top
U$338  [#_17#0]  136.27,41.15 0 top
U$339  [#_18#0]  136.27,43.69 0 top
U$340  [#_19#0]  136.27,46.23 0 top
U$341  [#_20#0]  136.27,48.77 0 top
U$342  [#_21#0]  136.27,51.31 0 top
U$343  [#_22#0]  136.27,53.85 0 top
U$344  [#WS2812_#0]  155.83,58.93 0 top
U$345  [#0#TX_#0]  155.83,56.39 0 top
U$346  [#1#RX_#0]  155.83,53.85 0 top
U$347  [#4#CIPO_#0]  155.83,51.31 0 top
U$348  [#3#COPI_#0]  155.83,48.77 0 top
U$349  [#2#SCK_#0]  155.83,46.23 0 top
U$350  [#_SCL#7#23#0]  136.27,56.39 0 top
U$351  [#_SDA#6#0]  136.27,58.93 0 top
U$352  [#29#ADC3_#0]  155.83,38.61 0 top
U$353  [#28#ADC2_#0]  155.83,36.07 0 top
U$354  [#27#ADC1_#0]  155.83,33.53 0 top
U$355  [#26#ADC0_#0]  155.83,30.99 0 top
U$356  [#_VUSB#0]  136.27,36.07 0 top
U$357  [#_EN#0]  136.27,33.53 0 top
U$358  [#_VBATT#0]  136.27,30.99 0 top
U$359  [#GND_#0]  155.83,28.45 0 top
U$360  [#AREF_#0]  155.83,25.91 0 top
U$361  [#3#3V_#0]  155.83,23.37 0 top
U$362  [##RESET##0]  155.7,20.83 0 top
U$363  [QWIIC_4MM]  137.54,16.26 270 top
U$364  [SFE_LOGO_NAME_FLAME_.1]  146.18,80.01 0 bottom
U$365  [250]  146.05,41.15 0 top
U$366  [CHARGE0]  146.05,38.61 0 top
U$367  [BOOT0]  146.05,20.83 0 top
U$368  [#22_#0]  136.27,53.85 0 bottom
U$369  [#21_#0]  136.27,51.31 0 bottom
U$370  [#20_#0]  136.27,48.77 0 bottom
U$371  [#19_#0]  136.27,46.23 0 bottom
U$372  [#18_#0]  136.27,43.69 0 bottom
U$373  [#17_#0]  136.27,41.15 0 bottom
U$374  [#16_#0]  136.27,38.61 0 bottom
U$375  [#VUSB_#0]  136.27,36.07 0 bottom
U$376  [#EN_#0]  136.27,33.53 0 bottom
U$377  [#VBATT_#0]  136.27,30.99 0 bottom
U$378  [#SCL_#0]  136.27,56.39 0 bottom
U$379  [#SDA_#0]  136.27,58.93 0 bottom
U$380  [#_#RESET##0]  155.83,20.83 0 bottom
U$381  [#_3#3V#0]  155.83,23.37 0 bottom
U$382  [#_AREF#0]  155.83,25.91 0 bottom
U$383  [#_GND#0]  155.83,28.45 0 bottom
U$384  [#_26#ADC0#0]  155.83,30.99 0 bottom
U$385  [#_27#ADC1#0]  155.83,33.53 0 bottom
U$386  [#_28#ADC2#0]  155.83,36.07 0 bottom
U$387  [#_29#ADC3#0]  155.83,38.61 0 bottom
U$388  [#_NC#0]  155.83,41.15 0 bottom
U$389  [#_NC#0]  155.83,43.69 0 bottom
U$390  [PWR0]  153.67,11.94 0 top
U$391  [#_NC_#0]  152.91,43.69 0 top
U$392  [#_NC_#0]  152.91,41.15 0 top
U$393  [#_2#SCK#0]  155.83,46.23 0 bottom
U$394  [#_3#COPI#0]  155.96,48.77 0 bottom
U$395  [#_4#CIPO#0]  155.83,51.31 0 bottom
U$396  [#_1#RX#0]  155.83,53.85 0 bottom
U$397  [#_0#TX#0]  155.83,56.39 0 bottom
U$398  [#_WS2812#0]  155.83,58.93 0 bottom
U$399  [#I2C#0]  140.84,14.48 90 bottom
U$400  RASPI_RP2040_LOGO_10MM  [RASPI_RP2040_LOGO_10MM]  146.18,76.71 0 bottom
U$401  RASPI_RP2040_LOGO_10MM  [RASPI_RP2040_LOGO_10MM]  151.77,98.3 0 top
U$402  [WS28120]  143.51,63.25 0 top
U$403  [AN0]  140.97,84.96 0 top
U$404  [RST0]  140.97,83.06 0 top
U$405  [CS0]  140.97,81.03 0 top
U$406  [CIPO0]  140.97,77.34 0 top
U$407  [SCK0]  140.97,79.25 0 top
U$408  [COPI0]  140.97,75.44 0 top
U$409  [3#3V0]  140.97,73.66 0 top
U$410  [GND0]  140.97,71.63 0 top
U$411  [GND0]  146.69,71.63 0 top
U$412  [5V0]  146.69,73.53 0 top
U$413  [SDA0]  146.69,75.44 0 top
U$414  [SCL0]  146.69,77.34 0 top
U$415  [TX0]  146.69,79.25 0 top
U$416  [RX0]  146.69,81.15 0 top
U$417  [INT0]  146.69,83.06 0 top
U$418  [PWM0]  146.69,84.96 0 top
U$419  [MIKROBUS0]  153.16,73.91 0 bottom
U$420  [#LED#0]  158.75,13.21 0 bottom
Y1  12MHz  [CRYSTAL-SMD-2X2.5MM]  47.12,51.31 270 top
Y2  12MHz  [CRYSTAL-SMD-2X2.5MM]  16.13,51.31 270 top
Y3  12MHz  [CRYSTAL-SMD-2X2.5MM]  78.11,51.31 270 top
Y4  12MHz  [CRYSTAL-SMD-2X2.5MM]  109.09,51.31 270 top
Y5  12MHz  [CRYSTAL-SMD-2X2.5MM]  140.08,51.31 270 top

## Library data of the parts
C1-C3 C6 C14 C15 C17-C25 C29-C34 C38-C40 C45 C49-C56 C60-C62 C67 C71-C78 C82-C84 C89 C93-C100 C104-C106 = SparkFun-Capacitors; PROD_ID: CAP-14993
C4 C9 C11 C26-C28 C35-C37 C42 C46 C57-C59 C64 C68 C79-C81 C86 C90 C101-C103 C108 = SparkFun-Capacitors; PROD_ID: CAP-14232
C5 C12 C13 C16 C47 C48 C69 C70 C91 C92 = SparkFun-Capacitors; PROD_ID: CAP-13063
C7 C10 C43 C44 C65 C66 C87 C88 C109 C110 = SparkFun-Capacitors; PROD_ID: CAP-14240
C8 C41 C63 C85 C107 = SparkFun-Capacitors; PROD_ID: CAP-12417
D1 D7 D12 D17 D22 = SparkFun-LED; PROD_ID: DIO-09003
D2 D6 D11 D16 D21 = SparkFun-DiscreteSemi; PROD_ID: DIO-11623
D3 D9 D14 D19 D24 = SparkFun-LED; PROD_ID: DIO-00819
D4 D8 D13 D18 D23 = SparkFun-LED; PROD_ID: DIO-08575
D5 D10 D15 D20 D25 = SparkFun-LED; PROD_ID: DIO-15591
E$1-E$4 FD1-FD20 LOGO1-LOGO10 U$17 U$32 U$64 U$73 U$111 U$112 U$148 U$149 U$195 U$196 U$232 U$233 U$279 U$280 U$316 U$317 U$363 U$364 U$400 U$401 = SparkFun-Aesthetics
E$5 E$6 = SparkFun-Retired
H1-H20 = SparkFun-Hardware
I2C I2C1-I2C4 PWR PWR1-PWR4 = SparkFun-Jumpers
J1 J7 J8 J13-J15 J21-J23 J29-J31 J37-J39 TP1-TP15 = SparkFun-Connectors
J2 J3 J17 J25 J33 = SparkFun-Connectors; PROD_ID: CONN-13694; VALUE: QWIIC_RIGHT_ANGLE
J4 J10 J18 J26 J34 = SparkFun-Connectors; PROD_ID: CONN-11443; SF_ID: PRT-08612
J5 J11 J19 J27 J35 = SparkFun-Connectors; PROD_ID: CONN-14122
J6 J12 J20 J28 J36 = SparkFun-Connectors; PROD_ID: CONN-16110
J9 J16 J24 J32 J40 = mikroBUS_SMD_BLACK; PROD_ID: CONN-16267
Q1-Q5 = SparkFun-DiscreteSemi; PROD_ID: TRANS-14388
R1 R4 R24 R25 R40 R41 R56 R57 R72 R73 = SparkFun-Resistors; PROD_ID: RES-14340
R2 R3 R5 R8 R11 R14 R22 R28 R29 R32 R33 R38 R44 R45 R48 R49 R54 R60 R61 R64 R65 R70 R76 R77 R80 = SparkFun-Resistors; PROD_ID: RES-14342
R6 R31 R47 R63 R79 = SparkFun-Resistors; PROD_ID: RES-08296
R7 R30 R46 R62 R78 = SparkFun-Resistors; PROD_ID: RES-15550
R9 R15 R16 R23 R26 R27 R39 R42 R43 R55 R58 R59 R71 R74 R75 = SparkFun-Resistors; PROD_ID: RES-14241
R10 R17 R20 R21 R36 R37 R52 R53 R68 R69 = SparkFun-Resistors; PROD_ID: RES-14341
R12 R13 R18 R19 R34 R35 R50 R51 R66 R67 = SparkFun-Resistors; PROD_ID: RES-15238
S1-S10 = SparkFun-Switches; PROD_ID: SWCH-14139
U1 U4 U11 U16 U21 = SparkFun-IC-Memory; PROD_ID: IC-15107
U2 U8 U13 U18 U23 = SparkFun-IC-Power; PROD_ID: IC-12551
U3 U10 U15 U20 U25 = SparkFun-IC-Power; PROD_ID: IC-09995
U5 U6 U12 U17 U22 = SparkFun-IC-Microcontroller; PROD_ID: IC-15502
U7 U9 U14 U19 U24 = SparkFun-IC-Power; PROD_ID: VREG-12457
U$1-U$16 U$18-U$31 U$33-U$63 U$65-U$72 U$74-U$110 U$113-U$147 U$150-U$194 U$197-U$231 U$234-U$278 U$281-U$315 U$318-U$362 U$365-U$399 U$402-U$420 = output
Y1-Y5 = SparkFun-Clocks; PROD_ID: XTAL-15540